# EAGLE board SGP40 Breakout-Panel (EAGLE 9.6.2), part 1 of 3
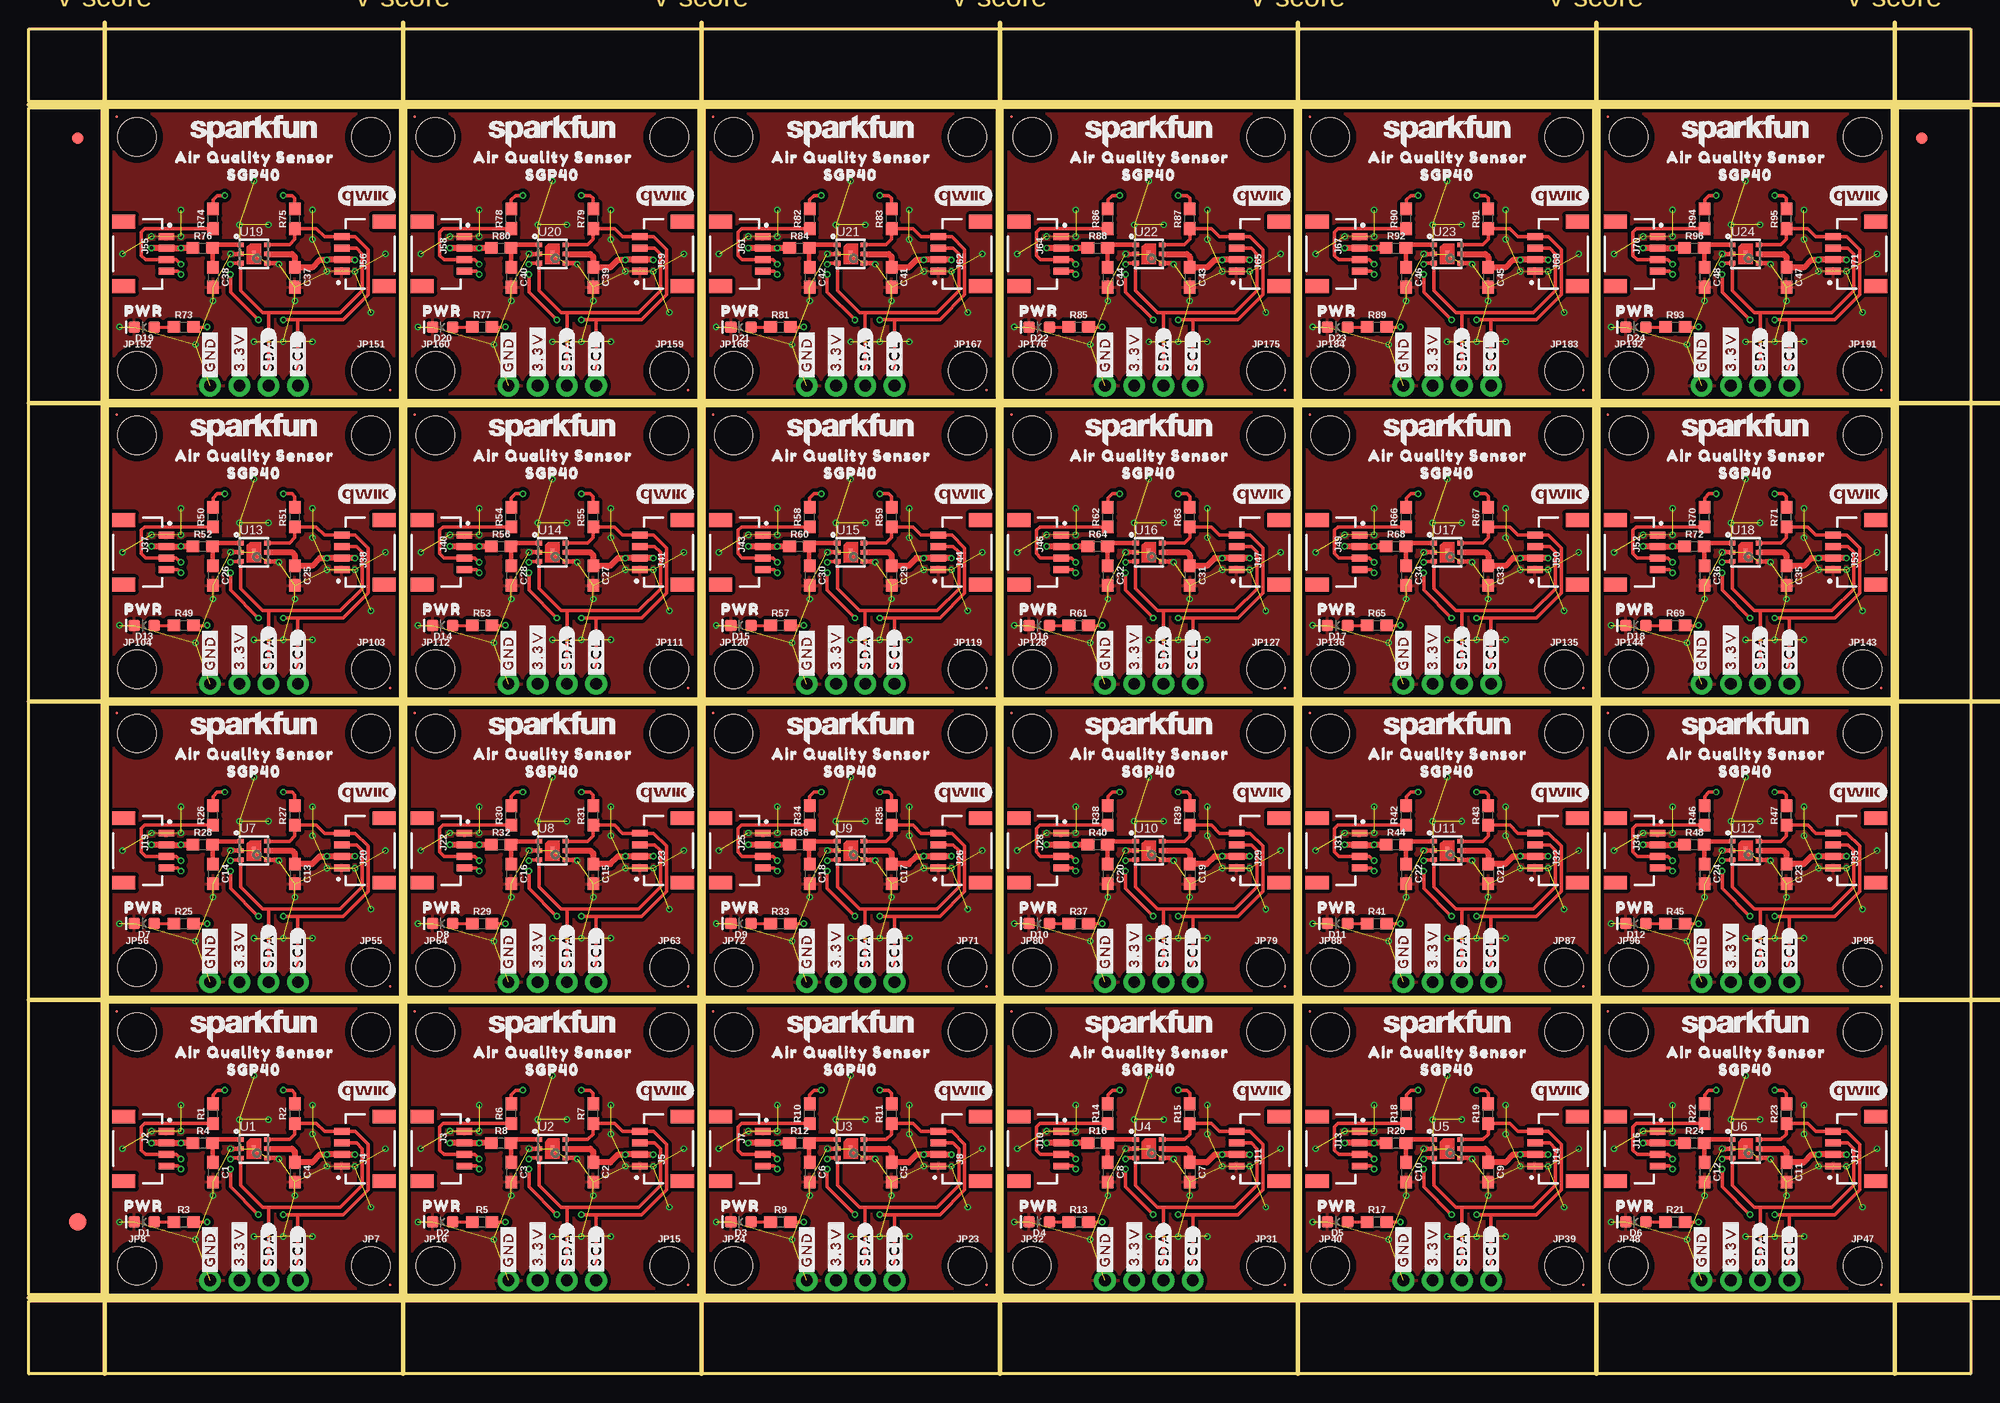
[diagram p0: board, top side]
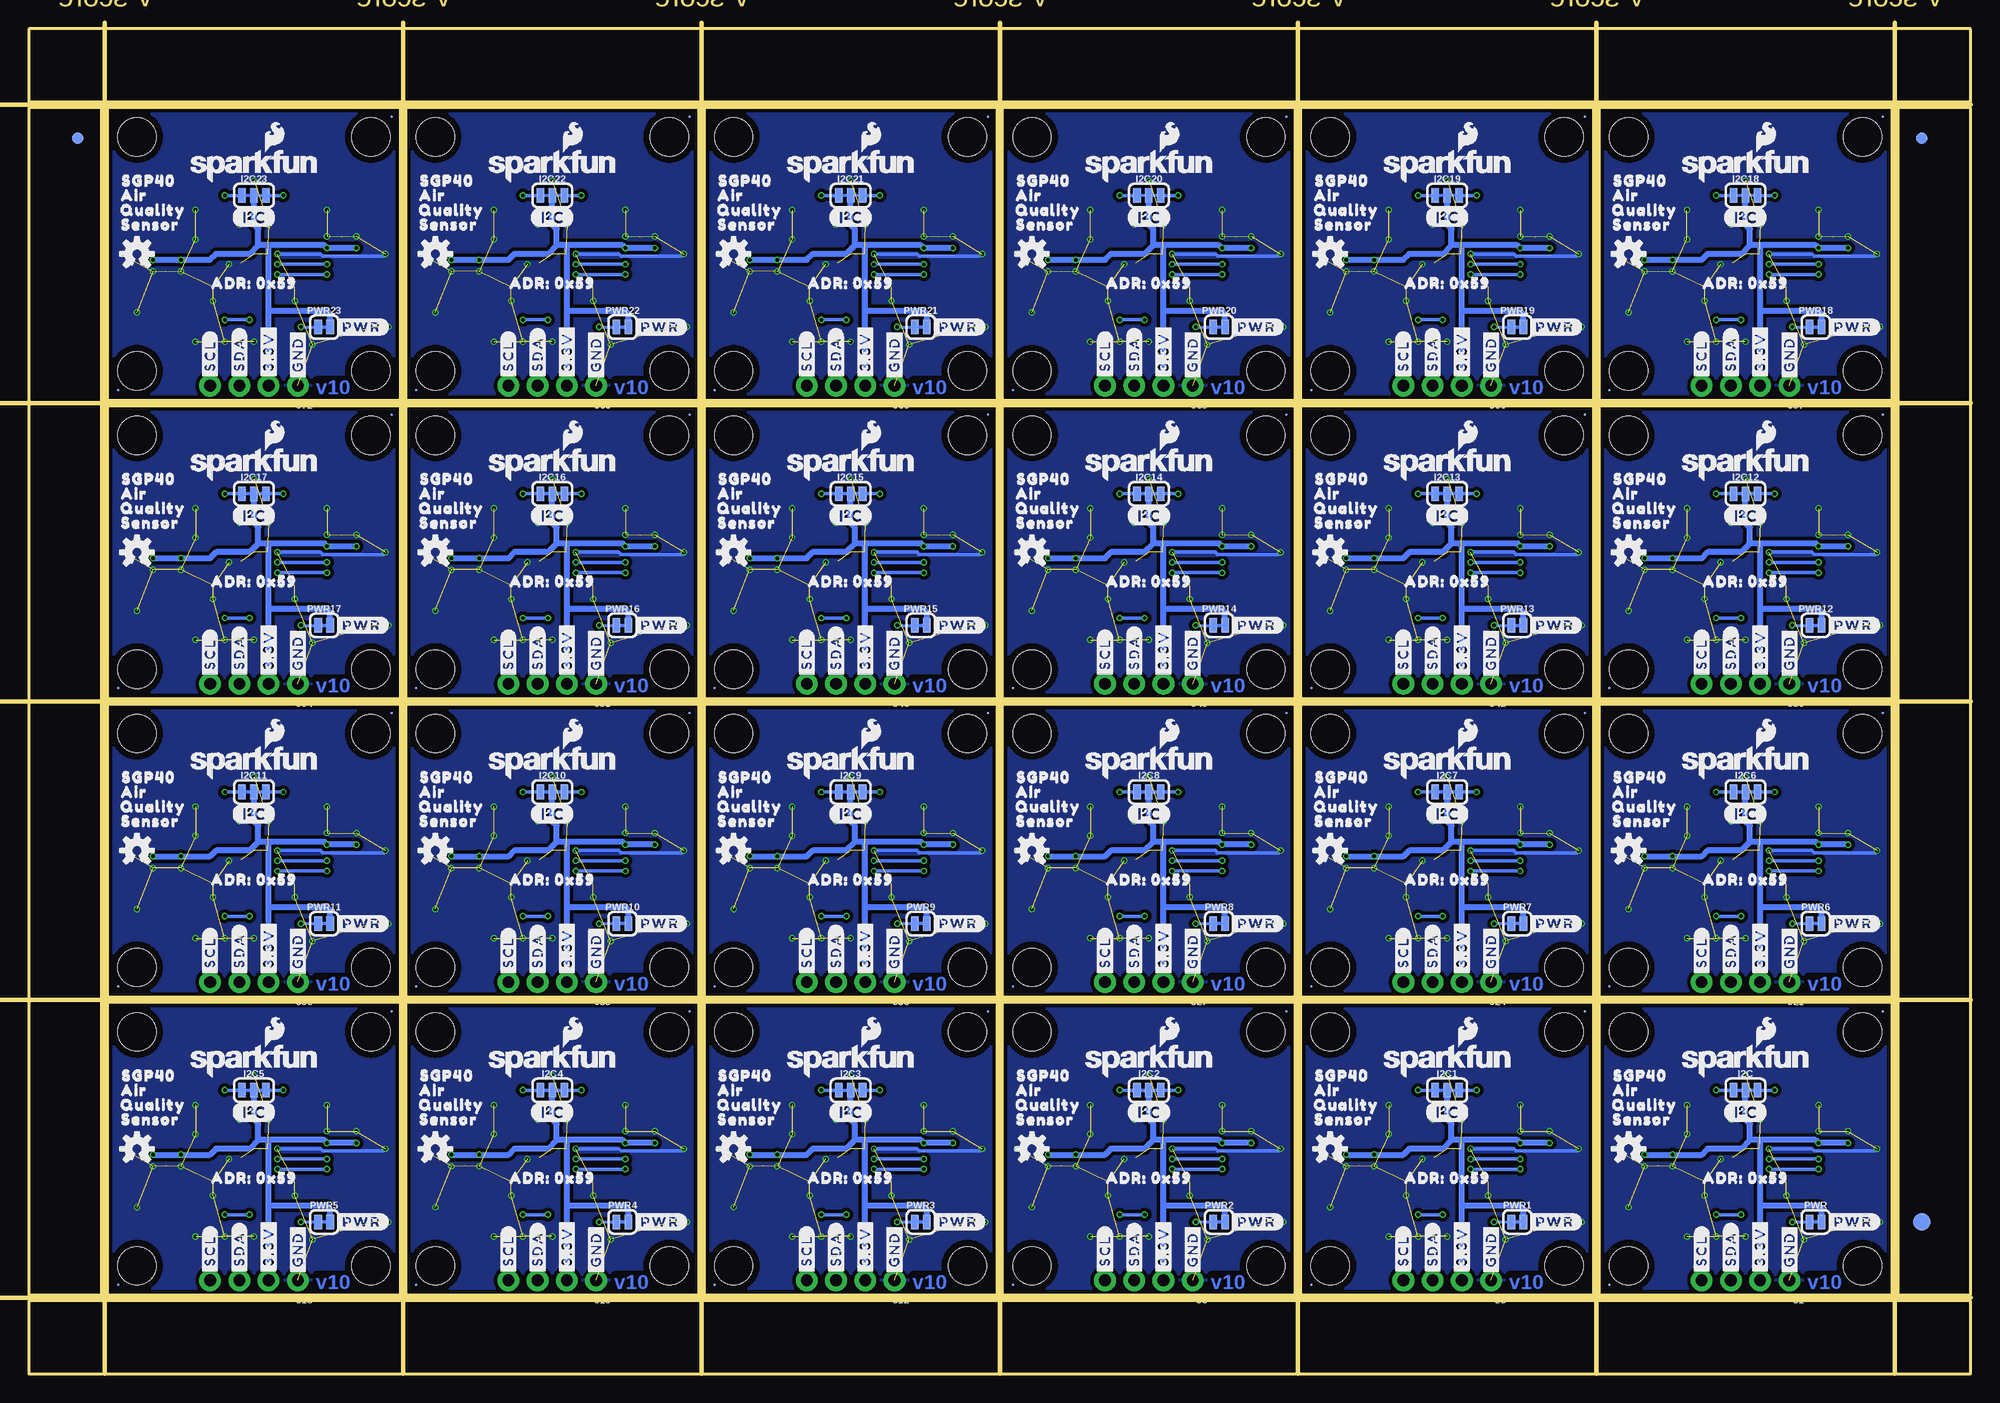
[diagram p1: board, bottom side, seen from below]

Size 168.66 x 116.84 mm. Coordinates in mm from the lower left corner, seen from the top.
Outline: 6.86,6.86 6.86,32.26 32.26,32.26 32.26,6.86 6.86,6.86
Outline: 32.77,6.86 32.77,32.26 58.17,32.26 58.17,6.86 32.77,6.86
Outline: 58.67,6.86 58.67,32.26 84.07,32.26 84.07,6.86 58.67,6.86
Outline: 84.58,6.86 84.58,32.26 109.98,32.26 109.98,6.86 84.58,6.86
Outline: 110.49,6.86 110.49,32.26 135.89,32.26 135.89,6.86 110.49,6.86
Outline: 136.4,6.86 136.4,32.26 161.8,32.26 161.8,6.86 136.4,6.86
Outline: 6.86,32.77 6.86,58.17 32.26,58.17 32.26,32.77 6.86,32.77
Outline: 32.77,32.77 32.77,58.17 58.17,58.17 58.17,32.77 32.77,32.77
Outline: 58.67,32.77 58.67,58.17 84.07,58.17 84.07,32.77 58.67,32.77
Outline: 84.58,32.77 84.58,58.17 109.98,58.17 109.98,32.77 84.58,32.77
Outline: 110.49,32.77 110.49,58.17 135.89,58.17 135.89,32.77 110.49,32.77
Outline: 136.4,32.77 136.4,58.17 161.8,58.17 161.8,32.77 136.4,32.77
Outline: 6.86,58.67 6.86,84.07 32.26,84.07 32.26,58.67 6.86,58.67
Outline: 32.77,58.67 32.77,84.07 58.17,84.07 58.17,58.67 32.77,58.67
Outline: 58.67,58.67 58.67,84.07 84.07,84.07 84.07,58.67 58.67,58.67
Outline: 84.58,58.67 84.58,84.07 109.98,84.07 109.98,58.67 84.58,58.67
Outline: 110.49,58.67 110.49,84.07 135.89,84.07 135.89,58.67 110.49,58.67
Outline: 136.4,58.67 136.4,84.07 161.8,84.07 161.8,58.67 136.4,58.67
Outline: 6.86,84.58 6.86,109.98 32.26,109.98 32.26,84.58 6.86,84.58
Outline: 32.77,84.58 32.77,109.98 58.17,109.98 58.17,84.58 32.77,84.58
Outline: 58.67,84.58 58.67,109.98 84.07,109.98 84.07,84.58 58.67,84.58
Outline: 84.58,84.58 84.58,109.98 109.98,109.98 109.98,84.58 84.58,84.58
Outline: 110.49,84.58 110.49,109.98 135.89,109.98 135.89,84.58 110.49,84.58
Outline: 136.4,84.58 136.4,109.98 161.8,109.98 161.8,84.58 136.4,84.58
Outline: 0,6.35 168.66,6.35 168.66,0 0,0 0,6.35
Outline: 162.31,109.98 168.66,109.98 168.66,6.86 162.31,6.86 162.31,109.98
Outline: 0,116.84 168.66,116.84 168.66,110.49 0,110.49 0,116.84
Outline: 0,109.98 6.35,109.98 6.35,6.86 0,6.86 0,109.98
Copper layers (1*16): Top 0.035mm / dielectric 1.5mm / Bottom 0.035mm
Design rules "SGP40 Breakout": minimum track width 5mil, minimum drill 0.3mm, track to track 5mil, track to pad 5mil, pad to pad 5mil, via to via 5mil, smd to smd 5mil, copper to edge 7mil, drill to drill 7mil, minimum pad ring 5mil, minimum via ring 5mil, stop-mask expansion 2.5mil, vias tented up to drill 25mil, thermal gap 10mil
Milling: 12 lines

## Footprints (pad centres in the part's own frame; a part is rotated, then mirrored left to right if it is on the bottom)
0603 = smd 1.1 x 1: 1 -0.85,0; 2 0.85,0
LED-0603 = smd 1 x 1: A -0.877,0; C 0.877,0
FIDUCIAL-1X2 = smd 1 x 1: 1 0,0
FIDUCIAL-1.5X3 = smd 1.5 x 1.5: 1 0,0
SMT-JUMPER_3_2-NC_TRACE_SILK = smd 0.66 x 1.27: 1 -1.041,0; 2 0,0; 3 1.041,0
1X04_NO_SILK = drill 1.016 pad 1.88: 1 0,0; 2 2.54,0; 3 5.08,0; 4 7.62,0
JST04_1MM_RA = smd 0.6 x 1.35: 1 -1.5,0; 2 -0.5,0; 3 0.5,0; 4 1.5,0 | smd 1.2 x 2: NC1 2.8,-3.675; NC2 -2.8,-3.675
FIDUCIAL-0.2MM = smd 0.2 x 0.2: 1 0,0
STAND-OFF = hole 3.302: 0,0
SMT-JUMPER_2_NC_TRACE_SILK = smd 0.66 x 1.27: 1 -0.521,0; 2 0.521,0
SGP40 = smd 0.55 x 0.4: 1 -1.15,0.8; 2 -1.15,0; 3 -1.15,-0.8; 4 1.15,-0.8; 5 1.15,0; 6 1.15,0.8 | smd 0.305 x 0.61: DIEPAD 0,0

## Placement (x,y rotation side)
C1  1.0uF  [0603]  16,17.53 270 top
C2  1.0uF  [0603]  49.02,17.53 270 top
C3  1.0uF  [0603]  41.91,17.53 270 top
C4  1.0uF  [0603]  23.11,17.53 270 top
C5  1.0uF  [0603]  74.93,17.53 270 top
C6  1.0uF  [0603]  67.82,17.53 270 top
C7  1.0uF  [0603]  100.84,17.53 270 top
C8  1.0uF  [0603]  93.73,17.53 270 top
C9  1.0uF  [0603]  126.75,17.53 270 top
C10  1.0uF  [0603]  119.63,17.53 270 top
C11  1.0uF  [0603]  152.65,17.53 270 top
C12  1.0uF  [0603]  145.54,17.53 270 top
C13  1.0uF  [0603]  23.11,43.43 270 top
C14  1.0uF  [0603]  16,43.43 270 top
C15  1.0uF  [0603]  49.02,43.43 270 top
C16  1.0uF  [0603]  41.91,43.43 270 top
C17  1.0uF  [0603]  74.93,43.43 270 top
C18  1.0uF  [0603]  67.82,43.43 270 top
C19  1.0uF  [0603]  100.84,43.43 270 top
C20  1.0uF  [0603]  93.73,43.43 270 top
C21  1.0uF  [0603]  126.75,43.43 270 top
C22  1.0uF  [0603]  119.63,43.43 270 top
C23  1.0uF  [0603]  152.65,43.43 270 top
C24  1.0uF  [0603]  145.54,43.43 270 top
C25  1.0uF  [0603]  23.11,69.34 270 top
C26  1.0uF  [0603]  16,69.34 270 top
C27  1.0uF  [0603]  49.02,69.34 270 top
C28  1.0uF  [0603]  41.91,69.34 270 top
C29  1.0uF  [0603]  74.93,69.34 270 top
C30  1.0uF  [0603]  67.82,69.34 270 top
C31  1.0uF  [0603]  100.84,69.34 270 top
C32  1.0uF  [0603]  93.73,69.34 270 top
C33  1.0uF  [0603]  126.75,69.34 270 top
C34  1.0uF  [0603]  119.63,69.34 270 top
C35  1.0uF  [0603]  152.65,69.34 270 top
C36  1.0uF  [0603]  145.54,69.34 270 top
C37  1.0uF  [0603]  23.11,95.25 270 top
C38  1.0uF  [0603]  16,95.25 270 top
C39  1.0uF  [0603]  49.02,95.25 270 top
C40  1.0uF  [0603]  41.91,95.25 270 top
C41  1.0uF  [0603]  74.93,95.25 270 top
C42  1.0uF  [0603]  67.82,95.25 270 top
C43  1.0uF  [0603]  100.84,95.25 270 top
C44  1.0uF  [0603]  93.73,95.25 270 top
C45  1.0uF  [0603]  126.75,95.25 270 top
C46  1.0uF  [0603]  119.63,95.25 270 top
C47  1.0uF  [0603]  152.65,95.25 270 top
C48  1.0uF  [0603]  145.54,95.25 270 top
D1  RED  [LED-0603]  10.03,13.21 180 top
D2  RED  [LED-0603]  35.94,13.21 180 top
D3  RED  [LED-0603]  61.85,13.21 180 top
D4  RED  [LED-0603]  87.76,13.21 180 top
D5  RED  [LED-0603]  113.67,13.21 180 top
D6  RED  [LED-0603]  139.57,13.21 180 top
D7  RED  [LED-0603]  10.03,39.12 180 top
D8  RED  [LED-0603]  35.94,39.12 180 top
D9  RED  [LED-0603]  61.85,39.12 180 top
D10  RED  [LED-0603]  87.76,39.12 180 top
D11  RED  [LED-0603]  113.67,39.12 180 top
D12  RED  [LED-0603]  139.57,39.12 180 top
D13  RED  [LED-0603]  10.03,65.02 180 top
D14  RED  [LED-0603]  35.94,65.02 180 top
D15  RED  [LED-0603]  61.85,65.02 180 top
D16  RED  [LED-0603]  87.76,65.02 180 top
D17  RED  [LED-0603]  113.67,65.02 180 top
D18  RED  [LED-0603]  139.57,65.02 180 top
D19  RED  [LED-0603]  10.03,90.93 180 top
D20  RED  [LED-0603]  35.94,90.93 180 top
D21  RED  [LED-0603]  61.85,90.93 180 top
D22  RED  [LED-0603]  87.76,90.93 180 top
D23  RED  [LED-0603]  113.67,90.93 180 top
D24  RED  [LED-0603]  139.57,90.93 180 top
E$1  [FIDUCIAL-1X2]  4.23,107.31 0 top
E$2  [FIDUCIAL-1X2]  4.23,107.31 0 bottom
E$3  [FIDUCIAL-1X2]  164.42,107.31 0 top
E$4  [FIDUCIAL-1X2]  164.42,107.31 0 bottom
E$5  [FIDUCIAL-1.5X3]  4.23,13.21 0 top
E$6  [FIDUCIAL-1.5X3]  4.23,13.21 0 bottom
I2C  JUMPER-SMT_3_2-NC_TRACE_SILK  [SMT-JUMPER_3_2-NC_TRACE_SILK]  19.56,24.64 0 bottom
I2C1  JUMPER-SMT_3_2-NC_TRACE_SILK  [SMT-JUMPER_3_2-NC_TRACE_SILK]  45.47,24.64 0 bottom
I2C2  JUMPER-SMT_3_2-NC_TRACE_SILK  [SMT-JUMPER_3_2-NC_TRACE_SILK]  71.37,24.64 0 bottom
I2C3  JUMPER-SMT_3_2-NC_TRACE_SILK  [SMT-JUMPER_3_2-NC_TRACE_SILK]  97.28,24.64 0 bottom
I2C4  JUMPER-SMT_3_2-NC_TRACE_SILK  [SMT-JUMPER_3_2-NC_TRACE_SILK]  123.19,24.64 0 bottom
I2C5  JUMPER-SMT_3_2-NC_TRACE_SILK  [SMT-JUMPER_3_2-NC_TRACE_SILK]  149.1,24.64 0 bottom
I2C6  JUMPER-SMT_3_2-NC_TRACE_SILK  [SMT-JUMPER_3_2-NC_TRACE_SILK]  19.56,50.55 0 bottom
I2C7  JUMPER-SMT_3_2-NC_TRACE_SILK  [SMT-JUMPER_3_2-NC_TRACE_SILK]  45.47,50.55 0 bottom
I2C8  JUMPER-SMT_3_2-NC_TRACE_SILK  [SMT-JUMPER_3_2-NC_TRACE_SILK]  71.37,50.55 0 bottom
I2C9  JUMPER-SMT_3_2-NC_TRACE_SILK  [SMT-JUMPER_3_2-NC_TRACE_SILK]  97.28,50.55 0 bottom
I2C10  JUMPER-SMT_3_2-NC_TRACE_SILK  [SMT-JUMPER_3_2-NC_TRACE_SILK]  123.19,50.55 0 bottom
I2C11  JUMPER-SMT_3_2-NC_TRACE_SILK  [SMT-JUMPER_3_2-NC_TRACE_SILK]  149.1,50.55 0 bottom
I2C12  JUMPER-SMT_3_2-NC_TRACE_SILK  [SMT-JUMPER_3_2-NC_TRACE_SILK]  19.56,76.45 0 bottom
I2C13  JUMPER-SMT_3_2-NC_TRACE_SILK  [SMT-JUMPER_3_2-NC_TRACE_SILK]  45.47,76.45 0 bottom
I2C14  JUMPER-SMT_3_2-NC_TRACE_SILK  [SMT-JUMPER_3_2-NC_TRACE_SILK]  71.37,76.45 0 bottom
I2C15  JUMPER-SMT_3_2-NC_TRACE_SILK  [SMT-JUMPER_3_2-NC_TRACE_SILK]  97.28,76.45 0 bottom
I2C16  JUMPER-SMT_3_2-NC_TRACE_SILK  [SMT-JUMPER_3_2-NC_TRACE_SILK]  123.19,76.45 0 bottom
I2C17  JUMPER-SMT_3_2-NC_TRACE_SILK  [SMT-JUMPER_3_2-NC_TRACE_SILK]  149.1,76.45 0 bottom
I2C18  JUMPER-SMT_3_2-NC_TRACE_SILK  [SMT-JUMPER_3_2-NC_TRACE_SILK]  19.56,102.36 0 bottom
I2C19  JUMPER-SMT_3_2-NC_TRACE_SILK  [SMT-JUMPER_3_2-NC_TRACE_SILK]  45.47,102.36 0 bottom
I2C20  JUMPER-SMT_3_2-NC_TRACE_SILK  [SMT-JUMPER_3_2-NC_TRACE_SILK]  71.37,102.36 0 bottom
I2C21  JUMPER-SMT_3_2-NC_TRACE_SILK  [SMT-JUMPER_3_2-NC_TRACE_SILK]  97.28,102.36 0 bottom
I2C22  JUMPER-SMT_3_2-NC_TRACE_SILK  [SMT-JUMPER_3_2-NC_TRACE_SILK]  123.19,102.36 0 bottom
I2C23  JUMPER-SMT_3_2-NC_TRACE_SILK  [SMT-JUMPER_3_2-NC_TRACE_SILK]  149.1,102.36 0 bottom
J1  DNP  [1X04_NO_SILK]  15.75,8.13 180 bottom
J2  QWIIC_RA  [JST04_1MM_RA]  11.94,19.56 270 top
J3  QWIIC_RA  [JST04_1MM_RA]  37.85,19.56 270 top
J4  QWIIC_RA  [JST04_1MM_RA]  27.18,19.56 90 top
J5  QWIIC_RA  [JST04_1MM_RA]  53.09,19.56 90 top
J6  DNP  [1X04_NO_SILK]  41.66,8.13 180 bottom
J7  QWIIC_RA  [JST04_1MM_RA]  63.75,19.56 270 top
J8  QWIIC_RA  [JST04_1MM_RA]  78.99,19.56 90 top
J9  DNP  [1X04_NO_SILK]  67.56,8.13 180 bottom
J10  QWIIC_RA  [JST04_1MM_RA]  89.66,19.56 270 top
J11  QWIIC_RA  [JST04_1MM_RA]  104.9,19.56 90 top
J12  DNP  [1X04_NO_SILK]  93.47,8.13 180 bottom
J13  QWIIC_RA  [JST04_1MM_RA]  115.57,19.56 270 top
J14  QWIIC_RA  [JST04_1MM_RA]  130.81,19.56 90 top
J15  DNP  [1X04_NO_SILK]  119.38,8.13 180 bottom
J16  QWIIC_RA  [JST04_1MM_RA]  141.48,19.56 270 top
J17  QWIIC_RA  [JST04_1MM_RA]  156.72,19.56 90 top
J18  DNP  [1X04_NO_SILK]  145.29,8.13 180 bottom
J19  QWIIC_RA  [JST04_1MM_RA]  11.94,45.47 270 top
J20  QWIIC_RA  [JST04_1MM_RA]  27.18,45.47 90 top
J21  DNP  [1X04_NO_SILK]  15.75,34.04 180 bottom
J22  QWIIC_RA  [JST04_1MM_RA]  37.85,45.47 270 top
J23  QWIIC_RA  [JST04_1MM_RA]  53.09,45.47 90 top
J24  DNP  [1X04_NO_SILK]  41.66,34.04 180 bottom
J25  QWIIC_RA  [JST04_1MM_RA]  63.75,45.47 270 top
J26  QWIIC_RA  [JST04_1MM_RA]  78.99,45.47 90 top
J27  DNP  [1X04_NO_SILK]  67.56,34.04 180 bottom
J28  QWIIC_RA  [JST04_1MM_RA]  89.66,45.47 270 top
J29  QWIIC_RA  [JST04_1MM_RA]  104.9,45.47 90 top
J30  DNP  [1X04_NO_SILK]  93.47,34.04 180 bottom
J31  QWIIC_RA  [JST04_1MM_RA]  115.57,45.47 270 top
J32  QWIIC_RA  [JST04_1MM_RA]  130.81,45.47 90 top
J33  DNP  [1X04_NO_SILK]  119.38,34.04 180 bottom
J34  QWIIC_RA  [JST04_1MM_RA]  141.48,45.47 270 top
J35  QWIIC_RA  [JST04_1MM_RA]  156.72,45.47 90 top
J36  DNP  [1X04_NO_SILK]  145.29,34.04 180 bottom
J37  QWIIC_RA  [JST04_1MM_RA]  11.94,71.37 270 top
J38  QWIIC_RA  [JST04_1MM_RA]  27.18,71.37 90 top
J39  DNP  [1X04_NO_SILK]  15.75,59.94 180 bottom
J40  QWIIC_RA  [JST04_1MM_RA]  37.85,71.37 270 top
J41  QWIIC_RA  [JST04_1MM_RA]  53.09,71.37 90 top
J42  DNP  [1X04_NO_SILK]  41.66,59.94 180 bottom
J43  QWIIC_RA  [JST04_1MM_RA]  63.75,71.37 270 top
J44  QWIIC_RA  [JST04_1MM_RA]  78.99,71.37 90 top
J45  DNP  [1X04_NO_SILK]  67.56,59.94 180 bottom
J46  QWIIC_RA  [JST04_1MM_RA]  89.66,71.37 270 top
J47  QWIIC_RA  [JST04_1MM_RA]  104.9,71.37 90 top
J48  DNP  [1X04_NO_SILK]  93.47,59.94 180 bottom
J49  QWIIC_RA  [JST04_1MM_RA]  115.57,71.37 270 top
J50  QWIIC_RA  [JST04_1MM_RA]  130.81,71.37 90 top
J51  DNP  [1X04_NO_SILK]  119.38,59.94 180 bottom
J52  QWIIC_RA  [JST04_1MM_RA]  141.48,71.37 270 top
J53  QWIIC_RA  [JST04_1MM_RA]  156.72,71.37 90 top
J54  DNP  [1X04_NO_SILK]  145.29,59.94 180 bottom
J55  QWIIC_RA  [JST04_1MM_RA]  11.94,97.28 270 top
J56  QWIIC_RA  [JST04_1MM_RA]  27.18,97.28 90 top
J57  DNP  [1X04_NO_SILK]  15.75,85.85 180 bottom
J58  QWIIC_RA  [JST04_1MM_RA]  37.85,97.28 270 top
J59  QWIIC_RA  [JST04_1MM_RA]  53.09,97.28 90 top
J60  DNP  [1X04_NO_SILK]  41.66,85.85 180 bottom
J61  QWIIC_RA  [JST04_1MM_RA]  63.75,97.28 270 top
J62  QWIIC_RA  [JST04_1MM_RA]  78.99,97.28 90 top
J63  DNP  [1X04_NO_SILK]  67.56,85.85 180 bottom
J64  QWIIC_RA  [JST04_1MM_RA]  89.66,97.28 270 top
J65  QWIIC_RA  [JST04_1MM_RA]  104.9,97.28 90 top
J66  DNP  [1X04_NO_SILK]  93.47,85.85 180 bottom
J67  QWIIC_RA  [JST04_1MM_RA]  115.57,97.28 270 top
J68  QWIIC_RA  [JST04_1MM_RA]  130.81,97.28 90 top
J69  DNP  [1X04_NO_SILK]  119.38,85.85 180 bottom
J70  QWIIC_RA  [JST04_1MM_RA]  141.48,97.28 270 top
J71  QWIIC_RA  [JST04_1MM_RA]  156.72,97.28 90 top
J72  DNP  [1X04_NO_SILK]  145.29,85.85 180 bottom
JP1  FIDUCIAL0.2MM  [FIDUCIAL-0.2MM]  7.62,31.5 0 bottom
JP2  FIDUCIAL0.2MM  [FIDUCIAL-0.2MM]  31.37,7.75 0 top
JP3  STAND-OFF  [STAND-OFF]  9.4,29.72 0 top
JP4  STAND-OFF  [STAND-OFF]  29.72,29.72 0 top
JP5  FIDUCIAL0.2MM  [FIDUCIAL-0.2MM]  31.37,7.75 0 bottom
JP6  FIDUCIAL0.2MM  [FIDUCIAL-0.2MM]  7.62,31.5 0 top
JP7  STAND-OFF  [STAND-OFF]  29.72,9.4 0 top
JP8  STAND-OFF  [STAND-OFF]  9.4,9.4 0 top
JP9  STAND-OFF  [STAND-OFF]  35.31,29.72 0 top
JP10  STAND-OFF  [STAND-OFF]  55.63,29.72 0 top
JP11  FIDUCIAL0.2MM  [FIDUCIAL-0.2MM]  57.28,7.75 0 top
JP12  FIDUCIAL0.2MM  [FIDUCIAL-0.2MM]  33.53,31.5 0 top
JP13  FIDUCIAL0.2MM  [FIDUCIAL-0.2MM]  33.53,31.5 0 bottom
JP14  FIDUCIAL0.2MM  [FIDUCIAL-0.2MM]  57.28,7.75 0 bottom
JP15  STAND-OFF  [STAND-OFF]  55.63,9.4 0 top
JP16  STAND-OFF  [STAND-OFF]  35.31,9.4 0 top
JP17  STAND-OFF  [STAND-OFF]  61.21,29.72 0 top
JP18  STAND-OFF  [STAND-OFF]  81.53,29.72 0 top
JP19  FIDUCIAL0.2MM  [FIDUCIAL-0.2MM]  83.19,7.75 0 top
JP20  FIDUCIAL0.2MM  [FIDUCIAL-0.2MM]  59.44,31.5 0 top
JP21  FIDUCIAL0.2MM  [FIDUCIAL-0.2MM]  59.44,31.5 0 bottom
JP22  FIDUCIAL0.2MM  [FIDUCIAL-0.2MM]  83.19,7.75 0 bottom
JP23  STAND-OFF  [STAND-OFF]  81.53,9.4 0 top
JP24  STAND-OFF  [STAND-OFF]  61.21,9.4 0 top
JP25  STAND-OFF  [STAND-OFF]  87.12,29.72 0 top
JP26  STAND-OFF  [STAND-OFF]  107.44,29.72 0 top
JP27  FIDUCIAL0.2MM  [FIDUCIAL-0.2MM]  109.09,7.75 0 top
JP28  FIDUCIAL0.2MM  [FIDUCIAL-0.2MM]  85.34,31.5 0 top
JP29  FIDUCIAL0.2MM  [FIDUCIAL-0.2MM]  85.34,31.5 0 bottom
JP30  FIDUCIAL0.2MM  [FIDUCIAL-0.2MM]  109.09,7.75 0 bottom
JP31  STAND-OFF  [STAND-OFF]  107.44,9.4 0 top
JP32  STAND-OFF  [STAND-OFF]  87.12,9.4 0 top
JP33  STAND-OFF  [STAND-OFF]  113.03,29.72 0 top
JP34  STAND-OFF  [STAND-OFF]  133.35,29.72 0 top
JP35  FIDUCIAL0.2MM  [FIDUCIAL-0.2MM]  135,7.75 0 top
JP36  FIDUCIAL0.2MM  [FIDUCIAL-0.2MM]  111.25,31.5 0 top
JP37  FIDUCIAL0.2MM  [FIDUCIAL-0.2MM]  111.25,31.5 0 bottom
JP38  FIDUCIAL0.2MM  [FIDUCIAL-0.2MM]  135,7.75 0 bottom
JP39  STAND-OFF  [STAND-OFF]  133.35,9.4 0 top
JP40  STAND-OFF  [STAND-OFF]  113.03,9.4 0 top
JP41  STAND-OFF  [STAND-OFF]  138.94,29.72 0 top
JP42  STAND-OFF  [STAND-OFF]  159.26,29.72 0 top
JP43  FIDUCIAL0.2MM  [FIDUCIAL-0.2MM]  160.91,7.75 0 top
JP44  FIDUCIAL0.2MM  [FIDUCIAL-0.2MM]  137.16,31.5 0 top
JP45  FIDUCIAL0.2MM  [FIDUCIAL-0.2MM]  137.16,31.5 0 bottom
JP46  FIDUCIAL0.2MM  [FIDUCIAL-0.2MM]  160.91,7.75 0 bottom
JP47  STAND-OFF  [STAND-OFF]  159.26,9.4 0 top
JP48  STAND-OFF  [STAND-OFF]  138.94,9.4 0 top
JP49  STAND-OFF  [STAND-OFF]  9.4,55.63 0 top
JP50  STAND-OFF  [STAND-OFF]  29.72,55.63 0 top
JP51  FIDUCIAL0.2MM  [FIDUCIAL-0.2MM]  31.37,33.66 0 top
JP52  FIDUCIAL0.2MM  [FIDUCIAL-0.2MM]  7.62,57.4 0 top
JP53  FIDUCIAL0.2MM  [FIDUCIAL-0.2MM]  7.62,57.4 0 bottom
JP54  FIDUCIAL0.2MM  [FIDUCIAL-0.2MM]  31.37,33.66 0 bottom
JP55  STAND-OFF  [STAND-OFF]  29.72,35.31 0 top
JP56  STAND-OFF  [STAND-OFF]  9.4,35.31 0 top
JP57  STAND-OFF  [STAND-OFF]  35.31,55.63 0 top
JP58  STAND-OFF  [STAND-OFF]  55.63,55.63 0 top
JP59  FIDUCIAL0.2MM  [FIDUCIAL-0.2MM]  57.28,33.66 0 top
JP60  FIDUCIAL0.2MM  [FIDUCIAL-0.2MM]  33.53,57.4 0 top
JP61  FIDUCIAL0.2MM  [FIDUCIAL-0.2MM]  33.53,57.4 0 bottom
JP62  FIDUCIAL0.2MM  [FIDUCIAL-0.2MM]  57.28,33.66 0 bottom
JP63  STAND-OFF  [STAND-OFF]  55.63,35.31 0 top
JP64  STAND-OFF  [STAND-OFF]  35.31,35.31 0 top
JP65  STAND-OFF  [STAND-OFF]  61.21,55.63 0 top
JP66  STAND-OFF  [STAND-OFF]  81.53,55.63 0 top
JP67  FIDUCIAL0.2MM  [FIDUCIAL-0.2MM]  83.19,33.66 0 top
JP68  FIDUCIAL0.2MM  [FIDUCIAL-0.2MM]  59.44,57.4 0 top
JP69  FIDUCIAL0.2MM  [FIDUCIAL-0.2MM]  59.44,57.4 0 bottom
JP70  FIDUCIAL0.2MM  [FIDUCIAL-0.2MM]  83.19,33.66 0 bottom
JP71  STAND-OFF  [STAND-OFF]  81.53,35.31 0 top
JP72  STAND-OFF  [STAND-OFF]  61.21,35.31 0 top
JP73  STAND-OFF  [STAND-OFF]  87.12,55.63 0 top
JP74  STAND-OFF  [STAND-OFF]  107.44,55.63 0 top
JP75  FIDUCIAL0.2MM  [FIDUCIAL-0.2MM]  109.09,33.66 0 top
JP76  FIDUCIAL0.2MM  [FIDUCIAL-0.2MM]  85.34,57.4 0 top
JP77  FIDUCIAL0.2MM  [FIDUCIAL-0.2MM]  85.34,57.4 0 bottom
JP78  FIDUCIAL0.2MM  [FIDUCIAL-0.2MM]  109.09,33.66 0 bottom
JP79  STAND-OFF  [STAND-OFF]  107.44,35.31 0 top
JP80  STAND-OFF  [STAND-OFF]  87.12,35.31 0 top
JP81  STAND-OFF  [STAND-OFF]  113.03,55.63 0 top
JP82  STAND-OFF  [STAND-OFF]  133.35,55.63 0 top
JP83  FIDUCIAL0.2MM  [FIDUCIAL-0.2MM]  135,33.66 0 top
JP84  FIDUCIAL0.2MM  [FIDUCIAL-0.2MM]  111.25,57.4 0 top
JP85  FIDUCIAL0.2MM  [FIDUCIAL-0.2MM]  111.25,57.4 0 bottom
JP86  FIDUCIAL0.2MM  [FIDUCIAL-0.2MM]  135,33.66 0 bottom
JP87  STAND-OFF  [STAND-OFF]  133.35,35.31 0 top
JP88  STAND-OFF  [STAND-OFF]  113.03,35.31 0 top
JP89  STAND-OFF  [STAND-OFF]  138.94,55.63 0 top
JP90  STAND-OFF  [STAND-OFF]  159.26,55.63 0 top
JP91  FIDUCIAL0.2MM  [FIDUCIAL-0.2MM]  160.91,33.66 0 top
JP92  FIDUCIAL0.2MM  [FIDUCIAL-0.2MM]  137.16,57.4 0 top
JP93  FIDUCIAL0.2MM  [FIDUCIAL-0.2MM]  137.16,57.4 0 bottom
JP94  FIDUCIAL0.2MM  [FIDUCIAL-0.2MM]  160.91,33.66 0 bottom
JP95  STAND-OFF  [STAND-OFF]  159.26,35.31 0 top
JP96  STAND-OFF  [STAND-OFF]  138.94,35.31 0 top
JP97  STAND-OFF  [STAND-OFF]  9.4,81.53 0 top
JP98  STAND-OFF  [STAND-OFF]  29.72,81.53 0 top
JP99  FIDUCIAL0.2MM  [FIDUCIAL-0.2MM]  31.37,59.56 0 top
JP100  FIDUCIAL0.2MM  [FIDUCIAL-0.2MM]  7.62,83.31 0 top
JP101  FIDUCIAL0.2MM  [FIDUCIAL-0.2MM]  7.62,83.31 0 bottom
JP102  FIDUCIAL0.2MM  [FIDUCIAL-0.2MM]  31.37,59.56 0 bottom
JP103  STAND-OFF  [STAND-OFF]  29.72,61.21 0 top
JP104  STAND-OFF  [STAND-OFF]  9.4,61.21 0 top
JP105  STAND-OFF  [STAND-OFF]  35.31,81.53 0 top
JP106  STAND-OFF  [STAND-OFF]  55.63,81.53 0 top
JP107  FIDUCIAL0.2MM  [FIDUCIAL-0.2MM]  57.28,59.56 0 top
JP108  FIDUCIAL0.2MM  [FIDUCIAL-0.2MM]  33.53,83.31 0 top
JP109  FIDUCIAL0.2MM  [FIDUCIAL-0.2MM]  33.53,83.31 0 bottom
JP110  FIDUCIAL0.2MM  [FIDUCIAL-0.2MM]  57.28,59.56 0 bottom
JP111  STAND-OFF  [STAND-OFF]  55.63,61.21 0 top
JP112  STAND-OFF  [STAND-OFF]  35.31,61.21 0 top
JP113  STAND-OFF  [STAND-OFF]  61.21,81.53 0 top
JP114  STAND-OFF  [STAND-OFF]  81.53,81.53 0 top
JP115  FIDUCIAL0.2MM  [FIDUCIAL-0.2MM]  83.19,59.56 0 top
JP116  FIDUCIAL0.2MM  [FIDUCIAL-0.2MM]  59.44,83.31 0 top
JP117  FIDUCIAL0.2MM  [FIDUCIAL-0.2MM]  59.44,83.31 0 bottom
JP118  FIDUCIAL0.2MM  [FIDUCIAL-0.2MM]  83.19,59.56 0 bottom
JP119  STAND-OFF  [STAND-OFF]  81.53,61.21 0 top
JP120  STAND-OFF  [STAND-OFF]  61.21,61.21 0 top
JP121  STAND-OFF  [STAND-OFF]  87.12,81.53 0 top
JP122  STAND-OFF  [STAND-OFF]  107.44,81.53 0 top
JP123  FIDUCIAL0.2MM  [FIDUCIAL-0.2MM]  109.09,59.56 0 top
JP124  FIDUCIAL0.2MM  [FIDUCIAL-0.2MM]  85.34,83.31 0 top
JP125  FIDUCIAL0.2MM  [FIDUCIAL-0.2MM]  85.34,83.31 0 bottom
JP126  FIDUCIAL0.2MM  [FIDUCIAL-0.2MM]  109.09,59.56 0 bottom
JP127  STAND-OFF  [STAND-OFF]  107.44,61.21 0 top
JP128  STAND-OFF  [STAND-OFF]  87.12,61.21 0 top
JP129  STAND-OFF  [STAND-OFF]  113.03,81.53 0 top
JP130  STAND-OFF  [STAND-OFF]  133.35,81.53 0 top
JP131  FIDUCIAL0.2MM  [FIDUCIAL-0.2MM]  135,59.56 0 top
JP132  FIDUCIAL0.2MM  [FIDUCIAL-0.2MM]  111.25,83.31 0 top
JP133  FIDUCIAL0.2MM  [FIDUCIAL-0.2MM]  111.25,83.31 0 bottom
JP134  FIDUCIAL0.2MM  [FIDUCIAL-0.2MM]  135,59.56 0 bottom
JP135  STAND-OFF  [STAND-OFF]  133.35,61.21 0 top
JP136  STAND-OFF  [STAND-OFF]  113.03,61.21 0 top
JP137  STAND-OFF  [STAND-OFF]  138.94,81.53 0 top
JP138  STAND-OFF  [STAND-OFF]  159.26,81.53 0 top
JP139  FIDUCIAL0.2MM  [FIDUCIAL-0.2MM]  160.91,59.56 0 top
JP140  FIDUCIAL0.2MM  [FIDUCIAL-0.2MM]  137.16,83.31 0 top
JP141  FIDUCIAL0.2MM  [FIDUCIAL-0.2MM]  137.16,83.31 0 bottom
JP142  FIDUCIAL0.2MM  [FIDUCIAL-0.2MM]  160.91,59.56 0 bottom
JP143  STAND-OFF  [STAND-OFF]  159.26,61.21 0 top
JP144  STAND-OFF  [STAND-OFF]  138.94,61.21 0 top
JP145  STAND-OFF  [STAND-OFF]  9.4,107.44 0 top
JP146  STAND-OFF  [STAND-OFF]  29.72,107.44 0 top
JP147  FIDUCIAL0.2MM  [FIDUCIAL-0.2MM]  31.37,85.47 0 top
JP148  FIDUCIAL0.2MM  [FIDUCIAL-0.2MM]  7.62,109.22 0 top
JP149  FIDUCIAL0.2MM  [FIDUCIAL-0.2MM]  7.62,109.22 0 bottom
JP150  FIDUCIAL0.2MM  [FIDUCIAL-0.2MM]  31.37,85.47 0 bottom
JP151  STAND-OFF  [STAND-OFF]  29.72,87.12 0 top
JP152  STAND-OFF  [STAND-OFF]  9.4,87.12 0 top
JP153  STAND-OFF  [STAND-OFF]  35.31,107.44 0 top
JP154  STAND-OFF  [STAND-OFF]  55.63,107.44 0 top
JP155  FIDUCIAL0.2MM  [FIDUCIAL-0.2MM]  57.28,85.47 0 top
JP156  FIDUCIAL0.2MM  [FIDUCIAL-0.2MM]  33.53,109.22 0 top
JP157  FIDUCIAL0.2MM  [FIDUCIAL-0.2MM]  33.53,109.22 0 bottom
JP158  FIDUCIAL0.2MM  [FIDUCIAL-0.2MM]  57.28,85.47 0 bottom
JP159  STAND-OFF  [STAND-OFF]  55.63,87.12 0 top
JP160  STAND-OFF  [STAND-OFF]  35.31,87.12 0 top
JP161  STAND-OFF  [STAND-OFF]  61.21,107.44 0 top
JP162  STAND-OFF  [STAND-OFF]  81.53,107.44 0 top
JP163  FIDUCIAL0.2MM  [FIDUCIAL-0.2MM]  83.19,85.47 0 top
JP164  FIDUCIAL0.2MM  [FIDUCIAL-0.2MM]  59.44,109.22 0 top
JP165  FIDUCIAL0.2MM  [FIDUCIAL-0.2MM]  59.44,109.22 0 bottom
JP166  FIDUCIAL0.2MM  [FIDUCIAL-0.2MM]  83.19,85.47 0 bottom
JP167  STAND-OFF  [STAND-OFF]  81.53,87.12 0 top
JP168  STAND-OFF  [STAND-OFF]  61.21,87.12 0 top
JP169  STAND-OFF  [STAND-OFF]  87.12,107.44 0 top
JP170  STAND-OFF  [STAND-OFF]  107.44,107.44 0 top
JP171  FIDUCIAL0.2MM  [FIDUCIAL-0.2MM]  109.09,85.47 0 top
JP172  FIDUCIAL0.2MM  [FIDUCIAL-0.2MM]  85.34,109.22 0 top
JP173  FIDUCIAL0.2MM  [FIDUCIAL-0.2MM]  85.34,109.22 0 bottom
JP174  FIDUCIAL0.2MM  [FIDUCIAL-0.2MM]  109.09,85.47 0 bottom
JP175  STAND-OFF  [STAND-OFF]  107.44,87.12 0 top
JP176  STAND-OFF  [STAND-OFF]  87.12,87.12 0 top
JP177  STAND-OFF  [STAND-OFF]  113.03,107.44 0 top
JP178  STAND-OFF  [STAND-OFF]  133.35,107.44 0 top
JP179  FIDUCIAL0.2MM  [FIDUCIAL-0.2MM]  135,85.47 0 top
JP180  FIDUCIAL0.2MM  [FIDUCIAL-0.2MM]  111.25,109.22 0 top
JP181  FIDUCIAL0.2MM  [FIDUCIAL-0.2MM]  111.25,109.22 0 bottom
JP182  FIDUCIAL0.2MM  [FIDUCIAL-0.2MM]  135,85.47 0 bottom
JP183  STAND-OFF  [STAND-OFF]  133.35,87.12 0 top
JP184  STAND-OFF  [STAND-OFF]  113.03,87.12 0 top
JP185  STAND-OFF  [STAND-OFF]  138.94,107.44 0 top
JP186  STAND-OFF  [STAND-OFF]  159.26,107.44 0 top
JP187  FIDUCIAL0.2MM  [FIDUCIAL-0.2MM]  160.91,85.47 0 top
JP188  FIDUCIAL0.2MM  [FIDUCIAL-0.2MM]  137.16,109.22 0 top
JP189  FIDUCIAL0.2MM  [FIDUCIAL-0.2MM]  137.16,109.22 0 bottom
JP190  FIDUCIAL0.2MM  [FIDUCIAL-0.2MM]  160.91,85.47 0 bottom
JP191  STAND-OFF  [STAND-OFF]  159.26,87.12 0 top
JP192  STAND-OFF  [STAND-OFF]  138.94,87.12 0 top
LOGO1  OSHW-LOGOS  [OSHW-LOGO-S]  55.63,19.56 0 bottom
LOGO2  QWIIC_LOGO_5MM  [QWIIC_5MM]  29.34,24.64 0 top
LOGO3  SFE_LOGO_NAME.1_INCH  [SFE_LOGO_NAME_.1]  19.56,27.18 0 bottom
LOGO4  SFE_LOGO_FLAME.1_INCH  [SFE_LOGO_FLAME_.1]  17.78,29.72 0 bottom
LOGO5  OSHW-LOGOS  [OSHW-LOGO-S]  29.72,19.56 0 bottom
LOGO6  SFE_LOGO_NAME.1_INCH  [SFE_LOGO_NAME_.1]  19.56,30.23 0 top
LOGO7  QWIIC_LOGO_5MM  [QWIIC_5MM]  55.24,24.64 0 top
LOGO8  SFE_LOGO_NAME.1_INCH  [SFE_LOGO_NAME_.1]  45.47,27.18 0 bottom
LOGO9  SFE_LOGO_FLAME.1_INCH  [SFE_LOGO_FLAME_.1]  43.69,29.72 0 bottom
LOGO10  SFE_LOGO_NAME.1_INCH  [SFE_LOGO_NAME_.1]  45.47,30.23 0 top
LOGO11  OSHW-LOGOS  [OSHW-LOGO-S]  81.53,19.56 0 bottom
LOGO12  QWIIC_LOGO_5MM  [QWIIC_5MM]  81.15,24.64 0 top
LOGO13  SFE_LOGO_NAME.1_INCH  [SFE_LOGO_NAME_.1]  71.37,27.18 0 bottom
LOGO14  SFE_LOGO_FLAME.1_INCH  [SFE_LOGO_FLAME_.1]  69.6,29.72 0 bottom
LOGO15  SFE_LOGO_NAME.1_INCH  [SFE_LOGO_NAME_.1]  71.37,30.23 0 top
LOGO16  OSHW-LOGOS  [OSHW-LOGO-S]  107.44,19.56 0 bottom
LOGO17  QWIIC_LOGO_5MM  [QWIIC_5MM]  107.06,24.64 0 top
LOGO18  SFE_LOGO_NAME.1_INCH  [SFE_LOGO_NAME_.1]  97.28,27.18 0 bottom
LOGO19  SFE_LOGO_FLAME.1_INCH  [SFE_LOGO_FLAME_.1]  95.5,29.72 0 bottom
LOGO20  SFE_LOGO_NAME.1_INCH  [SFE_LOGO_NAME_.1]  97.28,30.23 0 top
LOGO21  OSHW-LOGOS  [OSHW-LOGO-S]  133.35,19.56 0 bottom
LOGO22  QWIIC_LOGO_5MM  [QWIIC_5MM]  132.97,24.64 0 top
LOGO23  SFE_LOGO_NAME.1_INCH  [SFE_LOGO_NAME_.1]  123.19,27.18 0 bottom
LOGO24  SFE_LOGO_FLAME.1_INCH  [SFE_LOGO_FLAME_.1]  121.41,29.72 0 bottom
LOGO25  SFE_LOGO_NAME.1_INCH  [SFE_LOGO_NAME_.1]  123.19,30.23 0 top
LOGO26  OSHW-LOGOS  [OSHW-LOGO-S]  159.26,19.56 0 bottom
LOGO27  QWIIC_LOGO_5MM  [QWIIC_5MM]  158.88,24.64 0 top
LOGO28  SFE_LOGO_NAME.1_INCH  [SFE_LOGO_NAME_.1]  149.1,27.18 0 bottom
LOGO29  SFE_LOGO_FLAME.1_INCH  [SFE_LOGO_FLAME_.1]  147.32,29.72 0 bottom
LOGO30  SFE_LOGO_NAME.1_INCH  [SFE_LOGO_NAME_.1]  149.1,30.23 0 top
LOGO31  OSHW-LOGOS  [OSHW-LOGO-S]  29.72,45.47 0 bottom
LOGO32  QWIIC_LOGO_5MM  [QWIIC_5MM]  29.34,50.55 0 top
LOGO33  SFE_LOGO_NAME.1_INCH  [SFE_LOGO_NAME_.1]  19.56,53.09 0 bottom
LOGO34  SFE_LOGO_FLAME.1_INCH  [SFE_LOGO_FLAME_.1]  17.78,55.63 0 bottom
LOGO35  SFE_LOGO_NAME.1_INCH  [SFE_LOGO_NAME_.1]  19.56,56.13 0 top
LOGO36  OSHW-LOGOS  [OSHW-LOGO-S]  55.63,45.47 0 bottom
LOGO37  QWIIC_LOGO_5MM  [QWIIC_5MM]  55.24,50.55 0 top
LOGO38  SFE_LOGO_NAME.1_INCH  [SFE_LOGO_NAME_.1]  45.47,53.09 0 bottom
LOGO39  SFE_LOGO_FLAME.1_INCH  [SFE_LOGO_FLAME_.1]  43.69,55.63 0 bottom
LOGO40  SFE_LOGO_NAME.1_INCH  [SFE_LOGO_NAME_.1]  45.47,56.13 0 top
LOGO41  OSHW-LOGOS  [OSHW-LOGO-S]  81.53,45.47 0 bottom
LOGO42  QWIIC_LOGO_5MM  [QWIIC_5MM]  81.15,50.55 0 top
LOGO43  SFE_LOGO_NAME.1_INCH  [SFE_LOGO_NAME_.1]  71.37,53.09 0 bottom
LOGO44  SFE_LOGO_FLAME.1_INCH  [SFE_LOGO_FLAME_.1]  69.6,55.63 0 bottom
LOGO45  SFE_LOGO_NAME.1_INCH  [SFE_LOGO_NAME_.1]  71.37,56.13 0 top
LOGO46  OSHW-LOGOS  [OSHW-LOGO-S]  107.44,45.47 0 bottom
LOGO47  QWIIC_LOGO_5MM  [QWIIC_5MM]  107.06,50.55 0 top
LOGO48  SFE_LOGO_NAME.1_INCH  [SFE_LOGO_NAME_.1]  97.28,53.09 0 bottom
LOGO49  SFE_LOGO_FLAME.1_INCH  [SFE_LOGO_FLAME_.1]  95.5,55.63 0 bottom
LOGO50  SFE_LOGO_NAME.1_INCH  [SFE_LOGO_NAME_.1]  97.28,56.13 0 top
LOGO51  OSHW-LOGOS  [OSHW-LOGO-S]  133.35,45.47 0 bottom
LOGO52  QWIIC_LOGO_5MM  [QWIIC_5MM]  132.97,50.55 0 top
LOGO53  SFE_LOGO_NAME.1_INCH  [SFE_LOGO_NAME_.1]  123.19,53.09 0 bottom
LOGO54  SFE_LOGO_FLAME.1_INCH  [SFE_LOGO_FLAME_.1]  121.41,55.63 0 bottom
LOGO55  SFE_LOGO_NAME.1_INCH  [SFE_LOGO_NAME_.1]  123.19,56.13 0 top
LOGO56  OSHW-LOGOS  [OSHW-LOGO-S]  159.26,45.47 0 bottom
LOGO57  QWIIC_LOGO_5MM  [QWIIC_5MM]  158.88,50.55 0 top
LOGO58  SFE_LOGO_NAME.1_INCH  [SFE_LOGO_NAME_.1]  149.1,53.09 0 bottom
LOGO59  SFE_LOGO_FLAME.1_INCH  [SFE_LOGO_FLAME_.1]  147.32,55.63 0 bottom
LOGO60  SFE_LOGO_NAME.1_INCH  [SFE_LOGO_NAME_.1]  149.1,56.13 0 top
LOGO61  OSHW-LOGOS  [OSHW-LOGO-S]  29.72,71.37 0 bottom
LOGO62  QWIIC_LOGO_5MM  [QWIIC_5MM]  29.34,76.45 0 top
LOGO63  SFE_LOGO_NAME.1_INCH  [SFE_LOGO_NAME_.1]  19.56,78.99 0 bottom
LOGO64  SFE_LOGO_FLAME.1_INCH  [SFE_LOGO_FLAME_.1]  17.78,81.53 0 bottom
LOGO65  SFE_LOGO_NAME.1_INCH  [SFE_LOGO_NAME_.1]  19.56,82.04 0 top
LOGO66  OSHW-LOGOS  [OSHW-LOGO-S]  55.63,71.37 0 bottom
LOGO67  QWIIC_LOGO_5MM  [QWIIC_5MM]  55.24,76.45 0 top
LOGO68  SFE_LOGO_NAME.1_INCH  [SFE_LOGO_NAME_.1]  45.47,78.99 0 bottom
LOGO69  SFE_LOGO_FLAME.1_INCH  [SFE_LOGO_FLAME_.1]  43.69,81.53 0 bottom
LOGO70  SFE_LOGO_NAME.1_INCH  [SFE_LOGO_NAME_.1]  45.47,82.04 0 top
LOGO71  OSHW-LOGOS  [OSHW-LOGO-S]  81.53,71.37 0 bottom
LOGO72  QWIIC_LOGO_5MM  [QWIIC_5MM]  81.15,76.45 0 top
LOGO73  SFE_LOGO_NAME.1_INCH  [SFE_LOGO_NAME_.1]  71.37,78.99 0 bottom
LOGO74  SFE_LOGO_FLAME.1_INCH  [SFE_LOGO_FLAME_.1]  69.6,81.53 0 bottom
LOGO75  SFE_LOGO_NAME.1_INCH  [SFE_LOGO_NAME_.1]  71.37,82.04 0 top
LOGO76  OSHW-LOGOS  [OSHW-LOGO-S]  107.44,71.37 0 bottom
LOGO77  QWIIC_LOGO_5MM  [QWIIC_5MM]  107.06,76.45 0 top
LOGO78  SFE_LOGO_NAME.1_INCH  [SFE_LOGO_NAME_.1]  97.28,78.99 0 bottom
LOGO79  SFE_LOGO_FLAME.1_INCH  [SFE_LOGO_FLAME_.1]  95.5,81.53 0 bottom
LOGO80  SFE_LOGO_NAME.1_INCH  [SFE_LOGO_NAME_.1]  97.28,82.04 0 top
LOGO81  OSHW-LOGOS  [OSHW-LOGO-S]  133.35,71.37 0 bottom
LOGO82  QWIIC_LOGO_5MM  [QWIIC_5MM]  132.97,76.45 0 top
LOGO83  SFE_LOGO_NAME.1_INCH  [SFE_LOGO_NAME_.1]  123.19,78.99 0 bottom
LOGO84  SFE_LOGO_FLAME.1_INCH  [SFE_LOGO_FLAME_.1]  121.41,81.53 0 bottom
LOGO85  SFE_LOGO_NAME.1_INCH  [SFE_LOGO_NAME_.1]  123.19,82.04 0 top
LOGO86  OSHW-LOGOS  [OSHW-LOGO-S]  159.26,71.37 0 bottom
LOGO87  QWIIC_LOGO_5MM  [QWIIC_5MM]  158.88,76.45 0 top
LOGO88  SFE_LOGO_NAME.1_INCH  [SFE_LOGO_NAME_.1]  149.1,78.99 0 bottom
LOGO89  SFE_LOGO_FLAME.1_INCH  [SFE_LOGO_FLAME_.1]  147.32,81.53 0 bottom
LOGO90  SFE_LOGO_NAME.1_INCH  [SFE_LOGO_NAME_.1]  149.1,82.04 0 top
LOGO91  OSHW-LOGOS  [OSHW-LOGO-S]  29.72,97.28 0 bottom
LOGO92  QWIIC_LOGO_5MM  [QWIIC_5MM]  29.34,102.36 0 top
LOGO93  SFE_LOGO_NAME.1_INCH  [SFE_LOGO_NAME_.1]  19.56,104.9 0 bottom
LOGO94  SFE_LOGO_FLAME.1_INCH  [SFE_LOGO_FLAME_.1]  17.78,107.44 0 bottom
LOGO95  SFE_LOGO_NAME.1_INCH  [SFE_LOGO_NAME_.1]  19.56,107.95 0 top
LOGO96  OSHW-LOGOS  [OSHW-LOGO-S]  55.63,97.28 0 bottom
LOGO97  QWIIC_LOGO_5MM  [QWIIC_5MM]  55.24,102.36 0 top
LOGO98  SFE_LOGO_NAME.1_INCH  [SFE_LOGO_NAME_.1]  45.47,104.9 0 bottom
LOGO99  SFE_LOGO_FLAME.1_INCH  [SFE_LOGO_FLAME_.1]  43.69,107.44 0 bottom
LOGO100  SFE_LOGO_NAME.1_INCH  [SFE_LOGO_NAME_.1]  45.47,107.95 0 top
LOGO101  OSHW-LOGOS  [OSHW-LOGO-S]  81.53,97.28 0 bottom
LOGO102  QWIIC_LOGO_5MM  [QWIIC_5MM]  81.15,102.36 0 top
LOGO103  SFE_LOGO_NAME.1_INCH  [SFE_LOGO_NAME_.1]  71.37,104.9 0 bottom
LOGO104  SFE_LOGO_FLAME.1_INCH  [SFE_LOGO_FLAME_.1]  69.6,107.44 0 bottom
LOGO105  SFE_LOGO_NAME.1_INCH  [SFE_LOGO_NAME_.1]  71.37,107.95 0 top
LOGO106  OSHW-LOGOS  [OSHW-LOGO-S]  107.44,97.28 0 bottom
LOGO107  QWIIC_LOGO_5MM  [QWIIC_5MM]  107.06,102.36 0 top
LOGO108  SFE_LOGO_NAME.1_INCH  [SFE_LOGO_NAME_.1]  97.28,104.9 0 bottom
LOGO109  SFE_LOGO_FLAME.1_INCH  [SFE_LOGO_FLAME_.1]  95.5,107.44 0 bottom
LOGO110  SFE_LOGO_NAME.1_INCH  [SFE_LOGO_NAME_.1]  97.28,107.95 0 top
LOGO111  OSHW-LOGOS  [OSHW-LOGO-S]  133.35,97.28 0 bottom
LOGO112  QWIIC_LOGO_5MM  [QWIIC_5MM]  132.97,102.36 0 top
LOGO113  SFE_LOGO_NAME.1_INCH  [SFE_LOGO_NAME_.1]  123.19,104.9 0 bottom
LOGO114  SFE_LOGO_FLAME.1_INCH  [SFE_LOGO_FLAME_.1]  121.41,107.44 0 bottom
LOGO115  SFE_LOGO_NAME.1_INCH  [SFE_LOGO_NAME_.1]  123.19,107.95 0 top
LOGO116  OSHW-LOGOS  [OSHW-LOGO-S]  159.26,97.28 0 bottom
LOGO117  QWIIC_LOGO_5MM  [QWIIC_5MM]  158.88,102.36 0 top
LOGO118  SFE_LOGO_NAME.1_INCH  [SFE_LOGO_NAME_.1]  149.1,104.9 0 bottom
LOGO119  SFE_LOGO_FLAME.1_INCH  [SFE_LOGO_FLAME_.1]  147.32,107.44 0 bottom
LOGO120  SFE_LOGO_NAME.1_INCH  [SFE_LOGO_NAME_.1]  149.1,107.95 0 top
PWR  JUMPER-SMT_2_NC_TRACE_SILK  [SMT-JUMPER_2_NC_TRACE_SILK]  13.46,13.21 0 bottom
PWR1  JUMPER-SMT_2_NC_TRACE_SILK  [SMT-JUMPER_2_NC_TRACE_SILK]  39.37,13.21 0 bottom
PWR2  JUMPER-SMT_2_NC_TRACE_SILK  [SMT-JUMPER_2_NC_TRACE_SILK]  65.28,13.21 0 bottom
PWR3  JUMPER-SMT_2_NC_TRACE_SILK  [SMT-JUMPER_2_NC_TRACE_SILK]  91.19,13.21 0 bottom
PWR4  JUMPER-SMT_2_NC_TRACE_SILK  [SMT-JUMPER_2_NC_TRACE_SILK]  117.09,13.21 0 bottom
PWR5  JUMPER-SMT_2_NC_TRACE_SILK  [SMT-JUMPER_2_NC_TRACE_SILK]  143,13.21 0 bottom
PWR6  JUMPER-SMT_2_NC_TRACE_SILK  [SMT-JUMPER_2_NC_TRACE_SILK]  13.46,39.12 0 bottom
PWR7  JUMPER-SMT_2_NC_TRACE_SILK  [SMT-JUMPER_2_NC_TRACE_SILK]  39.37,39.12 0 bottom
PWR8  JUMPER-SMT_2_NC_TRACE_SILK  [SMT-JUMPER_2_NC_TRACE_SILK]  65.28,39.12 0 bottom
PWR9  JUMPER-SMT_2_NC_TRACE_SILK  [SMT-JUMPER_2_NC_TRACE_SILK]  91.19,39.12 0 bottom
PWR10  JUMPER-SMT_2_NC_TRACE_SILK  [SMT-JUMPER_2_NC_TRACE_SILK]  117.09,39.12 0 bottom
PWR11  JUMPER-SMT_2_NC_TRACE_SILK  [SMT-JUMPER_2_NC_TRACE_SILK]  143,39.12 0 bottom
PWR12  JUMPER-SMT_2_NC_TRACE_SILK  [SMT-JUMPER_2_NC_TRACE_SILK]  13.46,65.02 0 bottom
PWR13  JUMPER-SMT_2_NC_TRACE_SILK  [SMT-JUMPER_2_NC_TRACE_SILK]  39.37,65.02 0 bottom
PWR14  JUMPER-SMT_2_NC_TRACE_SILK  [SMT-JUMPER_2_NC_TRACE_SILK]  65.28,65.02 0 bottom
PWR15  JUMPER-SMT_2_NC_TRACE_SILK  [SMT-JUMPER_2_NC_TRACE_SILK]  91.19,65.02 0 bottom
PWR16  JUMPER-SMT_2_NC_TRACE_SILK  [SMT-JUMPER_2_NC_TRACE_SILK]  117.09,65.02 0 bottom
PWR17  JUMPER-SMT_2_NC_TRACE_SILK  [SMT-JUMPER_2_NC_TRACE_SILK]  143,65.02 0 bottom
PWR18  JUMPER-SMT_2_NC_TRACE_SILK  [SMT-JUMPER_2_NC_TRACE_SILK]  13.46,90.93 0 bottom
PWR19  JUMPER-SMT_2_NC_TRACE_SILK  [SMT-JUMPER_2_NC_TRACE_SILK]  39.37,90.93 0 bottom
PWR20  JUMPER-SMT_2_NC_TRACE_SILK  [SMT-JUMPER_2_NC_TRACE_SILK]  65.28,90.93 0 bottom
PWR21  JUMPER-SMT_2_NC_TRACE_SILK  [SMT-JUMPER_2_NC_TRACE_SILK]  91.19,90.93 0 bottom
PWR22  JUMPER-SMT_2_NC_TRACE_SILK  [SMT-JUMPER_2_NC_TRACE_SILK]  117.09,90.93 0 bottom
PWR23  JUMPER-SMT_2_NC_TRACE_SILK  [SMT-JUMPER_2_NC_TRACE_SILK]  143,90.93 0 bottom
R1  4.7k  [0603]  16,22.61 90 top
R2  4.7k  [0603]  23.11,22.61 90 top
R3  1k  [0603]  13.46,13.21 0 top
R4  4.7  [0603]  15.11,20.07 0 top
R5  1k  [0603]  39.37,13.21 0 top
R6  4.7k  [0603]  41.91,22.61 90 top
R7  4.7k  [0603]  49.02,22.61 90 top
R8  4.7  [0603]  41.02,20.07 0 top
R9  1k  [0603]  65.28,13.21 0 top
R10  4.7k  [0603]  67.82,22.61 90 top
R11  4.7k  [0603]  74.93,22.61 90 top
R12  4.7  [0603]  66.93,20.07 0 top
R13  1k  [0603]  91.19,13.21 0 top
R14  4.7k  [0603]  93.73,22.61 90 top
R15  4.7k  [0603]  100.84,22.61 90 top
R16  4.7  [0603]  92.84,20.07 0 top
R17  1k  [0603]  117.09,13.21 0 top
R18  4.7k  [0603]  119.63,22.61 90 top
R19  4.7k  [0603]  126.75,22.61 90 top
R20  4.7  [0603]  118.75,20.07 0 top
R21  1k  [0603]  143,13.21 0 top
R22  4.7k  [0603]  145.54,22.61 90 top
R23  4.7k  [0603]  152.65,22.61 90 top
R24  4.7  [0603]  144.65,20.07 0 top
R25  1k  [0603]  13.46,39.12 0 top
R26  4.7k  [0603]  16,48.51 90 top
R27  4.7k  [0603]  23.11,48.51 90 top
R28  4.7  [0603]  15.11,45.97 0 top
R29  1k  [0603]  39.37,39.12 0 top
R30  4.7k  [0603]  41.91,48.51 90 top
R31  4.7k  [0603]  49.02,48.51 90 top
R32  4.7  [0603]  41.02,45.97 0 top
R33  1k  [0603]  65.28,39.12 0 top
R34  4.7k  [0603]  67.82,48.51 90 top
R35  4.7k  [0603]  74.93,48.51 90 top
R36  4.7  [0603]  66.93,45.97 0 top
R37  1k  [0603]  91.19,39.12 0 top
R38  4.7k  [0603]  93.73,48.51 90 top
R39  4.7k  [0603]  100.84,48.51 90 top
R40  4.7  [0603]  92.84,45.97 0 top
R41  1k  [0603]  117.09,39.12 0 top
R42  4.7k  [0603]  119.63,48.51 90 top
R43  4.7k  [0603]  126.75,48.51 90 top
R44  4.7  [0603]  118.75,45.97 0 top
R45  1k  [0603]  143,39.12 0 top
R46  4.7k  [0603]  145.54,48.51 90 top
R47  4.7k  [0603]  152.65,48.51 90 top
R48  4.7  [0603]  144.65,45.97 0 top
R49  1k  [0603]  13.46,65.02 0 top
R50  4.7k  [0603]  16,74.42 90 top
R51  4.7k  [0603]  23.11,74.42 90 top
R52  4.7  [0603]  15.11,71.88 0 top
R53  1k  [0603]  39.37,65.02 0 top
R54  4.7k  [0603]  41.91,74.42 90 top
R55  4.7k  [0603]  49.02,74.42 90 top
R56  4.7  [0603]  41.02,71.88 0 top
R57  1k  [0603]  65.28,65.02 0 top
R58  4.7k  [0603]  67.82,74.42 90 top
R59  4.7k  [0603]  74.93,74.42 90 top
R60  4.7  [0603]  66.93,71.88 0 top
R61  1k  [0603]  91.19,65.02 0 top
R62  4.7k  [0603]  93.73,74.42 90 top
R63  4.7k  [0603]  100.84,74.42 90 top
R64  4.7  [0603]  92.84,71.88 0 top
R65  1k  [0603]  117.09,65.02 0 top
R66  4.7k  [0603]  119.63,74.42 90 top
R67  4.7k  [0603]  126.75,74.42 90 top
R68  4.7  [0603]  118.75,71.88 0 top
R69  1k  [0603]  143,65.02 0 top
R70  4.7k  [0603]  145.54,74.42 90 top
R71  4.7k  [0603]  152.65,74.42 90 top
R72  4.7  [0603]  144.65,71.88 0 top
R73  1k  [0603]  13.46,90.93 0 top
R74  4.7k  [0603]  16,100.33 90 top
R75  4.7k  [0603]  23.11,100.33 90 top
R76  4.7  [0603]  15.11,97.79 0 top
R77  1k  [0603]  39.37,90.93 0 top
R78  4.7k  [0603]  41.91,100.33 90 top
R79  4.7k  [0603]  49.02,100.33 90 top
R80  4.7  [0603]  41.02,97.79 0 top
R81  1k  [0603]  65.28,90.93 0 top
R82  4.7k  [0603]  67.82,100.33 90 top
R83  4.7k  [0603]  74.93,100.33 90 top
R84  4.7  [0603]  66.93,97.79 0 top
R85  1k  [0603]  91.19,90.93 0 top
R86  4.7k  [0603]  93.73,100.33 90 top
R87  4.7k  [0603]  100.84,100.33 90 top
R88  4.7  [0603]  92.84,97.79 0 top
R89  1k  [0603]  117.09,90.93 0 top
R90  4.7k  [0603]  119.63,100.33 90 top
R91  4.7k  [0603]  126.75,100.33 90 top
R92  4.7  [0603]  118.75,97.79 0 top
R93  1k  [0603]  143,90.93 0 top
R94  4.7k  [0603]  145.54,100.33 90 top
R95  4.7k  [0603]  152.65,100.33 90 top
R96  4.7  [0603]  144.65,97.79 0 top
U1  SGP40  [SGP40]  19.56,19.56 0 top
U2  SGP40  [SGP40]  45.47,19.56 0 top
U3  SGP40  [SGP40]  71.37,19.56 0 top
U4  SGP40  [SGP40]  97.28,19.56 0 top
U5  SGP40  [SGP40]  123.19,19.56 0 top
U6  SGP40  [SGP40]  149.1,19.56 0 top
U7  SGP40  [SGP40]  19.56,45.47 0 top
U8  SGP40  [SGP40]  45.47,45.47 0 top
U9  SGP40  [SGP40]  71.37,45.47 0 top
U10  SGP40  [SGP40]  97.28,45.47 0 top
U11  SGP40  [SGP40]  123.19,45.47 0 top
U12  SGP40  [SGP40]  149.1,45.47 0 top
U13  SGP40  [SGP40]  19.56,71.37 0 top
U14  SGP40  [SGP40]  45.47,71.37 0 top
U15  SGP40  [SGP40]  71.37,71.37 0 top
U16  SGP40  [SGP40]  97.28,71.37 0 top
U17  SGP40  [SGP40]  123.19,71.37 0 top
U18  SGP40  [SGP40]  149.1,71.37 0 top
U19  SGP40  [SGP40]  19.56,97.28 0 top
U20  SGP40  [SGP40]  45.47,97.28 0 top
U21  SGP40  [SGP40]  71.37,97.28 0 top
U22  SGP40  [SGP40]  97.28,97.28 0 top
U23  SGP40  [SGP40]  123.19,97.28 0 top
U24  SGP40  [SGP40]  149.1,97.28 0 top
U$1  [#GND#0]  15.75,10.79 90 bottom
U$2  [#3#3V#0]  18.29,11.05 90 bottom
U$3  [#SDA#0]  20.83,8.64 90 bottom
U$4  [#SCL#0]  23.37,8.64 90 bottom
U$5  [PWR0]  7.62,14.61 0 top
U$6  [#PWR#0]  12.57,13.21 0 bottom
U$7  [I2C]  47.37,22.73 0 bottom
U$8  [SGP400]  45.47,26.42 0 top
U$9  [SGP400]  54.61,25.91 0 bottom
U$10  [AIR0]  39.75,27.94 0 top
U$11  [AIR0]  55.88,24.64 0 bottom
U$12  [QUALITY0]  44.2,27.94 0 top
U$13  [QUALITY0]  54.23,23.37 0 bottom
U$14  [SENSOR0]  49.91,27.94 0 top
U$15  [I2C]  21.46,22.73 0 bottom
U$16  [SENSOR0]  54.48,22.1 0 bottom
U$17  [ADR#_0X590]  45.47,17.02 0 bottom
U$18  [#GND#0]  41.66,10.79 90 top
U$19  [SGP400]  19.56,26.42 0 top
U$20  [SGP400]  28.7,25.91 0 bottom
U$21  [#3#3V#0]  44.2,11.05 90 top
U$22  [#SDA#0]  46.74,8.64 90 top
U$23  [AIR0]  13.84,27.94 0 top
U$24  [AIR0]  29.97,24.64 0 bottom
U$25  [QUALITY0]  18.29,27.94 0 top
U$26  [#SCL#0]  49.28,8.64 90 top
U$27  [#GND#0]  41.66,10.79 90 bottom
U$28  [QUALITY0]  28.32,23.37 0 bottom
U$29  [SENSOR0]  24,27.94 0 top
U$30  [SENSOR0]  28.57,22.1 0 bottom
U$31  [ADR#_0X590]  19.56,17.02 0 bottom
U$32  [#3#3V#0]  44.2,11.05 90 bottom
U$33  [#GND#0]  15.75,10.79 90 top
U$34  [#3#3V#0]  18.29,11.05 90 top
U$35  [#SDA#0]  20.83,8.64 90 top
U$36  [#SCL#0]  23.37,8.64 90 top
U$37  [#SDA#0]  46.74,8.64 90 bottom
U$38  [#SCL#0]  49.28,8.64 90 bottom
U$39  [PWR0]  33.53,14.61 0 top
U$40  [#PWR#0]  38.48,13.21 0 bottom
U$41  [I2C]  73.28,22.73 0 bottom
U$42  [SGP400]  71.37,26.42 0 top
U$43  [SGP400]  80.52,25.91 0 bottom
U$44  [AIR0]  65.66,27.94 0 top
U$45  [AIR0]  81.79,24.64 0 bottom
U$46  [QUALITY0]  70.1,27.94 0 top
U$47  [QUALITY0]  80.14,23.37 0 bottom
U$48  [SENSOR0]  75.82,27.94 0 top
U$49  [SENSOR0]  80.39,22.1 0 bottom
U$50  [ADR#_0X590]  71.37,17.02 0 bottom
U$51  [#GND#0]  67.56,10.79 90 top
U$52  [#3#3V#0]  70.1,11.05 90 top
U$53  [#SDA#0]  72.64,8.64 90 top
U$54  [#SCL#0]  75.18,8.64 90 top
U$55  [#GND#0]  67.56,10.79 90 bottom
U$56  [#3#3V#0]  70.1,11.05 90 bottom
U$57  [#SDA#0]  72.64,8.64 90 bottom
U$58  [#SCL#0]  75.18,8.64 90 bottom
U$59  [PWR0]  59.44,14.61 0 top
U$60  [#PWR#0]  64.39,13.21 0 bottom
U$61  [I2C]  99.19,22.73 0 bottom
U$62  [SGP400]  97.28,26.42 0 top
U$63  [SGP400]  106.43,25.91 0 bottom
U$64  [AIR0]  91.57,27.94 0 top
U$65  [AIR0]  107.7,24.64 0 bottom
U$66  [QUALITY0]  96.01,27.94 0 top
U$67  [QUALITY0]  106.05,23.37 0 bottom
U$68  [SENSOR0]  101.73,27.94 0 top
U$69  [SENSOR0]  106.3,22.1 0 bottom
U$70  [ADR#_0X590]  97.28,17.02 0 bottom
U$71  [#GND#0]  93.47,10.79 90 top
U$72  [#3#3V#0]  96.01,11.05 90 top
U$73  [#SDA#0]  98.55,8.64 90 top
U$74  [#SCL#0]  101.09,8.64 90 top
U$75  [#GND#0]  93.47,10.79 90 bottom
U$76  [#3#3V#0]  96.01,11.05 90 bottom
U$77  [#SDA#0]  98.55,8.64 90 bottom
U$78  [#SCL#0]  101.09,8.64 90 bottom
U$79  [PWR0]  85.34,14.61 0 top
U$80  [#PWR#0]  90.3,13.21 0 bottom
U$81  [I2C]  125.09,22.73 0 bottom
U$82  [SGP400]  123.19,26.42 0 top
U$83  [SGP400]  132.33,25.91 0 bottom
U$84  [AIR0]  117.48,27.94 0 top
U$85  [AIR0]  133.6,24.64 0 bottom
U$86  [QUALITY0]  121.92,27.94 0 top
U$87  [QUALITY0]  131.95,23.37 0 bottom
U$88  [SENSOR0]  127.64,27.94 0 top
U$89  [SENSOR0]  132.21,22.1 0 bottom
U$90  [ADR#_0X590]  123.19,17.02 0 bottom
U$91  [#GND#0]  119.38,10.79 90 top
U$92  [#3#3V#0]  121.92,11.05 90 top
U$93  [#SDA#0]  124.46,8.64 90 top
U$94  [#SCL#0]  127,8.64 90 top
U$95  [#GND#0]  119.38,10.79 90 bottom
U$96  [#3#3V#0]  121.92,11.05 90 bottom
U$97  [#SDA#0]  124.46,8.64 90 bottom
U$98  [#SCL#0]  127,8.64 90 bottom
U$99  [PWR0]  111.25,14.61 0 top
U$100  [#PWR#0]  116.2,13.21 0 bottom
U$101  [I2C]  151,22.73 0 bottom
U$102  [SGP400]  149.1,26.42 0 top
U$103  [SGP400]  158.24,25.91 0 bottom
U$104  [AIR0]  143.38,27.94 0 top
U$105  [AIR0]  159.51,24.64 0 bottom
U$106  [QUALITY0]  147.83,27.94 0 top
U$107  [QUALITY0]  157.86,23.37 0 bottom
U$108  [SENSOR0]  153.54,27.94 0 top
U$109  [SENSOR0]  158.12,22.1 0 bottom
U$110  [ADR#_0X590]  149.1,17.02 0 bottom
U$111  [#GND#0]  145.29,10.79 90 top
U$112  [#3#3V#0]  147.83,11.05 90 top
U$113  [#SDA#0]  150.37,8.64 90 top
U$114  [#SCL#0]  152.91,8.64 90 top
U$115  [#GND#0]  145.29,10.79 90 bottom
U$116  [#3#3V#0]  147.83,11.05 90 bottom
U$117  [#SDA#0]  150.37,8.64 90 bottom
U$118  [#SCL#0]  152.91,8.64 90 bottom
U$119  [PWR0]  137.16,14.61 0 top
U$120  [#PWR#0]  142.11,13.21 0 bottom
U$121  [I2C]  21.46,48.64 0 bottom
U$122  [SGP400]  19.56,52.32 0 top
U$123  [SGP400]  28.7,51.82 0 bottom
U$124  [AIR0]  13.84,53.85 0 top
U$125  [AIR0]  29.97,50.55 0 bottom
U$126  [QUALITY0]  18.29,53.85 0 top
U$127  [QUALITY0]  28.32,49.28 0 bottom
U$128  [SENSOR0]  24,53.85 0 top
U$129  [SENSOR0]  28.57,48.01 0 bottom
U$130  [ADR#_0X590]  19.56,42.93 0 bottom
U$131  [#GND#0]  15.75,36.7 90 top
U$132  [#3#3V#0]  18.29,36.96 90 top
U$133  [#SDA#0]  20.83,34.54 90 top
U$134  [#SCL#0]  23.37,34.54 90 top
U$135  [#GND#0]  15.75,36.7 90 bottom
U$136  [#3#3V#0]  18.29,36.96 90 bottom
U$137  [#SDA#0]  20.83,34.54 90 bottom
U$138  [#SCL#0]  23.37,34.54 90 bottom
U$139  [PWR0]  7.62,40.51 0 top
U$140  [#PWR#0]  12.57,39.12 0 bottom
U$141  [I2C]  47.37,48.64 0 bottom
U$142  [SGP400]  45.47,52.32 0 top
U$143  [SGP400]  54.61,51.82 0 bottom
U$144  [AIR0]  39.75,53.85 0 top
U$145  [AIR0]  55.88,50.55 0 bottom
U$146  [QUALITY0]  44.2,53.85 0 top
U$147  [QUALITY0]  54.23,49.28 0 bottom
U$148  [SENSOR0]  49.91,53.85 0 top
U$149  [SENSOR0]  54.48,48.01 0 bottom
U$150  [ADR#_0X590]  45.47,42.93 0 bottom
U$151  [#GND#0]  41.66,36.7 90 top
U$152  [#3#3V#0]  44.2,36.96 90 top
U$153  [#SDA#0]  46.74,34.54 90 top
U$154  [#SCL#0]  49.28,34.54 90 top
U$155  [#GND#0]  41.66,36.7 90 bottom
U$156  [#3#3V#0]  44.2,36.96 90 bottom
U$157  [#SDA#0]  46.74,34.54 90 bottom
U$158  [#SCL#0]  49.28,34.54 90 bottom
U$159  [PWR0]  33.53,40.51 0 top
U$160  [#PWR#0]  38.48,39.12 0 bottom
U$161  [I2C]  73.28,48.64 0 bottom
U$162  [SGP400]  71.37,52.32 0 top
U$163  [SGP400]  80.52,51.82 0 bottom
U$164  [AIR0]  65.66,53.85 0 top
U$165  [AIR0]  81.79,50.55 0 bottom
U$166  [QUALITY0]  70.1,53.85 0 top
U$167  [QUALITY0]  80.14,49.28 0 bottom
U$168  [SENSOR0]  75.82,53.85 0 top
U$169  [SENSOR0]  80.39,48.01 0 bottom
U$170  [ADR#_0X590]  71.37,42.93 0 bottom
U$171  [#GND#0]  67.56,36.7 90 top
U$172  [#3#3V#0]  70.1,36.96 90 top
U$173  [#SDA#0]  72.64,34.54 90 top
U$174  [#SCL#0]  75.18,34.54 90 top
U$175  [#GND#0]  67.56,36.7 90 bottom
U$176  [#3#3V#0]  70.1,36.96 90 bottom
U$177  [#SDA#0]  72.64,34.54 90 bottom
U$178  [#SCL#0]  75.18,34.54 90 bottom
U$179  [PWR0]  59.44,40.51 0 top
U$180  [#PWR#0]  64.39,39.12 0 bottom
U$181  [I2C]  99.19,48.64 0 bottom
U$182  [SGP400]  97.28,52.32 0 top
U$183  [SGP400]  106.43,51.82 0 bottom
U$184  [AIR0]  91.57,53.85 0 top
U$185  [AIR0]  107.7,50.55 0 bottom
U$186  [QUALITY0]  96.01,53.85 0 top
U$187  [QUALITY0]  106.05,49.28 0 bottom
U$188  [SENSOR0]  101.73,53.85 0 top
U$189  [SENSOR0]  106.3,48.01 0 bottom
U$190  [ADR#_0X590]  97.28,42.93 0 bottom
U$191  [#GND#0]  93.47,36.7 90 top
U$192  [#3#3V#0]  96.01,36.96 90 top
U$193  [#SDA#0]  98.55,34.54 90 top
U$194  [#SCL#0]  101.09,34.54 90 top
U$195  [#GND#0]  93.47,36.7 90 bottom
U$196  [#3#3V#0]  96.01,36.96 90 bottom
U$197  [#SDA#0]  98.55,34.54 90 bottom
U$198  [#SCL#0]  101.09,34.54 90 bottom
U$199  [PWR0]  85.34,40.51 0 top
U$200  [#PWR#0]  90.3,39.12 0 bottom
U$201  [I2C]  125.09,48.64 0 bottom
U$202  [SGP400]  123.19,52.32 0 top
U$203  [SGP400]  132.33,51.82 0 bottom
U$204  [AIR0]  117.48,53.85 0 top
U$205  [AIR0]  133.6,50.55 0 bottom
U$206  [QUALITY0]  121.92,53.85 0 top
U$207  [QUALITY0]  131.95,49.28 0 bottom
U$208  [SENSOR0]  127.64,53.85 0 top
U$209  [SENSOR0]  132.21,48.01 0 bottom
U$210  [ADR#_0X590]  123.19,42.93 0 bottom
U$211  [#GND#0]  119.38,36.7 90 top
U$212  [#3#3V#0]  121.92,36.96 90 top
U$213  [#SDA#0]  124.46,34.54 90 top
U$214  [#SCL#0]  127,34.54 90 top
U$215  [#GND#0]  119.38,36.7 90 bottom
U$216  [#3#3V#0]  121.92,36.96 90 bottom
U$217  [#SDA#0]  124.46,34.54 90 bottom
U$218  [#SCL#0]  127,34.54 90 bottom
U$219  [PWR0]  111.25,40.51 0 top
U$220  [#PWR#0]  116.2,39.12 0 bottom
U$221  [I2C]  151,48.64 0 bottom
U$222  [SGP400]  149.1,52.32 0 top
U$223  [SGP400]  158.24,51.82 0 bottom
U$224  [AIR0]  143.38,53.85 0 top
U$225  [AIR0]  159.51,50.55 0 bottom
U$226  [QUALITY0]  147.83,53.85 0 top
U$227  [QUALITY0]  157.86,49.28 0 bottom
U$228  [SENSOR0]  153.54,53.85 0 top
U$229  [SENSOR0]  158.12,48.01 0 bottom
U$230  [ADR#_0X590]  149.1,42.93 0 bottom
U$231  [#GND#0]  145.29,36.7 90 top
U$232  [#3#3V#0]  147.83,36.96 90 top
U$233  [#SDA#0]  150.37,34.54 90 top
U$234  [#SCL#0]  152.91,34.54 90 top
U$235  [#GND#0]  145.29,36.7 90 bottom
U$236  [#3#3V#0]  147.83,36.96 90 bottom
U$237  [#SDA#0]  150.37,34.54 90 bottom
U$238  [#SCL#0]  152.91,34.54 90 bottom
U$239  [PWR0]  137.16,40.51 0 top
U$240  [#PWR#0]  142.11,39.12 0 bottom
U$241  [I2C]  21.46,74.55 0 bottom
U$242  [SGP400]  19.56,78.23 0 top
U$243  [SGP400]  28.7,77.72 0 bottom
U$244  [AIR0]  13.84,79.76 0 top
U$245  [AIR0]  29.97,76.45 0 bottom
U$246  [QUALITY0]  18.29,79.76 0 top
U$247  [QUALITY0]  28.32,75.18 0 bottom
U$248  [SENSOR0]  24,79.76 0 top
U$249  [SENSOR0]  28.57,73.91 0 bottom
U$250  [ADR#_0X590]  19.56,68.83 0 bottom
U$251  [#GND#0]  15.75,62.61 90 top
U$252  [#3#3V#0]  18.29,62.86 90 top
U$253  [#SDA#0]  20.83,60.45 90 top
U$254  [#SCL#0]  23.37,60.45 90 top
U$255  [#GND#0]  15.75,62.61 90 bottom
U$256  [#3#3V#0]  18.29,62.86 90 bottom
U$257  [#SDA#0]  20.83,60.45 90 bottom
U$258  [#SCL#0]  23.37,60.45 90 bottom
U$259  [PWR0]  7.62,66.42 0 top
U$260  [#PWR#0]  12.57,65.02 0 bottom
U$261  [I2C]  47.37,74.55 0 bottom
U$262  [SGP400]  45.47,78.23 0 top
U$263  [SGP400]  54.61,77.72 0 bottom
U$264  [AIR0]  39.75,79.76 0 top
U$265  [AIR0]  55.88,76.45 0 bottom
U$266  [QUALITY0]  44.2,79.76 0 top
U$267  [QUALITY0]  54.23,75.18 0 bottom
U$268  [SENSOR0]  49.91,79.76 0 top
U$269  [SENSOR0]  54.48,73.91 0 bottom
U$270  [ADR#_0X590]  45.47,68.83 0 bottom
U$271  [#GND#0]  41.66,62.61 90 top
U$272  [#3#3V#0]  44.2,62.86 90 top
U$273  [#SDA#0]  46.74,60.45 90 top
U$274  [#SCL#0]  49.28,60.45 90 top
U$275  [#GND#0]  41.66,62.61 90 bottom
U$276  [#3#3V#0]  44.2,62.86 90 bottom
U$277  [#SDA#0]  46.74,60.45 90 bottom
U$278  [#SCL#0]  49.28,60.45 90 bottom
U$279  [PWR0]  33.53,66.42 0 top
U$280  [#PWR#0]  38.48,65.02 0 bottom
U$281  [I2C]  73.28,74.55 0 bottom
U$282  [SGP400]  71.37,78.23 0 top
U$283  [SGP400]  80.52,77.72 0 bottom
U$284  [AIR0]  65.66,79.76 0 top
U$285  [AIR0]  81.79,76.45 0 bottom
U$286  [QUALITY0]  70.1,79.76 0 top
U$287  [QUALITY0]  80.14,75.18 0 bottom
U$288  [SENSOR0]  75.82,79.76 0 top
U$289  [SENSOR0]  80.39,73.91 0 bottom
U$290  [ADR#_0X590]  71.37,68.83 0 bottom
U$291  [#GND#0]  67.56,62.61 90 top
U$292  [#3#3V#0]  70.1,62.86 90 top
U$293  [#SDA#0]  72.64,60.45 90 top
U$294  [#SCL#0]  75.18,60.45 90 top
U$295  [#GND#0]  67.56,62.61 90 bottom
U$296  [#3#3V#0]  70.1,62.86 90 bottom
U$297  [#SDA#0]  72.64,60.45 90 bottom
U$298  [#SCL#0]  75.18,60.45 90 bottom
U$299  [PWR0]  59.44,66.42 0 top
U$300  [#PWR#0]  64.39,65.02 0 bottom
U$301  [I2C]  99.19,74.55 0 bottom
U$302  [SGP400]  97.28,78.23 0 top
U$303  [SGP400]  106.43,77.72 0 bottom
U$304  [AIR0]  91.57,79.76 0 top
U$305  [AIR0]  107.7,76.45 0 bottom
U$306  [QUALITY0]  96.01,79.76 0 top
U$307  [QUALITY0]  106.05,75.18 0 bottom
U$308  [SENSOR0]  101.73,79.76 0 top
U$309  [SENSOR0]  106.3,73.91 0 bottom
U$310  [ADR#_0X590]  97.28,68.83 0 bottom
U$311  [#GND#0]  93.47,62.61 90 top
U$312  [#3#3V#0]  96.01,62.86 90 top
U$313  [#SDA#0]  98.55,60.45 90 top
U$314  [#SCL#0]  101.09,60.45 90 top
U$315  [#GND#0]  93.47,62.61 90 bottom
U$316  [#3#3V#0]  96.01,62.86 90 bottom
U$317  [#SDA#0]  98.55,60.45 90 bottom
U$318  [#SCL#0]  101.09,60.45 90 bottom
U$319  [PWR0]  85.34,66.42 0 top
U$320  [#PWR#0]  90.3,65.02 0 bottom
U$321  [I2C]  125.09,74.55 0 bottom
U$322  [SGP400]  123.19,78.23 0 top
U$323  [SGP400]  132.33,77.72 0 bottom
U$324  [AIR0]  117.48,79.76 0 top
U$325  [AIR0]  133.6,76.45 0 bottom
U$326  [QUALITY0]  121.92,79.76 0 top
U$327  [QUALITY0]  131.95,75.18 0 bottom
U$328  [SENSOR0]  127.64,79.76 0 top
U$329  [SENSOR0]  132.21,73.91 0 bottom
U$330  [ADR#_0X590]  123.19,68.83 0 bottom
U$331  [#GND#0]  119.38,62.61 90 top
U$332  [#3#3V#0]  121.92,62.86 90 top
U$333  [#SDA#0]  124.46,60.45 90 top
U$334  [#SCL#0]  127,60.45 90 top
U$335  [#GND#0]  119.38,62.61 90 bottom
U$336  [#3#3V#0]  121.92,62.86 90 bottom
U$337  [#SDA#0]  124.46,60.45 90 bottom
U$338  [#SCL#0]  127,60.45 90 bottom
U$339  [PWR0]  111.25,66.42 0 top
U$340  [#PWR#0]  116.2,65.02 0 bottom
U$341  [I2C]  151,74.55 0 bottom
U$342  [SGP400]  149.1,78.23 0 top
U$343  [SGP400]  158.24,77.72 0 bottom
U$344  [AIR0]  143.38,79.76 0 top
U$345  [AIR0]  159.51,76.45 0 bottom
U$346  [QUALITY0]  147.83,79.76 0 top
U$347  [QUALITY0]  157.86,75.18 0 bottom
U$348  [SENSOR0]  153.54,79.76 0 top
U$349  [SENSOR0]  158.12,73.91 0 bottom
U$350  [ADR#_0X590]  149.1,68.83 0 bottom
U$351  [#GND#0]  145.29,62.61 90 top
U$352  [#3#3V#0]  147.83,62.86 90 top
U$353  [#SDA#0]  150.37,60.45 90 top
U$354  [#SCL#0]  152.91,60.45 90 top
U$355  [#GND#0]  145.29,62.61 90 bottom
U$356  [#3#3V#0]  147.83,62.86 90 bottom
U$357  [#SDA#0]  150.37,60.45 90 bottom
U$358  [#SCL#0]  152.91,60.45 90 bottom
U$359  [PWR0]  137.16,66.42 0 top
U$360  [#PWR#0]  142.11,65.02 0 bottom
U$361  [I2C]  21.46,100.46 0 bottom
U$362  [SGP400]  19.56,104.14 0 top
U$363  [SGP400]  28.7,103.63 0 bottom
U$364  [AIR0]  13.84,105.66 0 top
U$365  [AIR0]  29.97,102.36 0 bottom
U$366  [QUALITY0]  18.29,105.66 0 top
U$367  [QUALITY0]  28.32,101.09 0 bottom
U$368  [SENSOR0]  24,105.66 0 top
U$369  [SENSOR0]  28.57,99.82 0 bottom
U$370  [ADR#_0X590]  19.56,94.74 0 bottom
U$371  [#GND#0]  15.75,88.52 90 top
U$372  [#3#3V#0]  18.29,88.77 90 top
U$373  [#SDA#0]  20.83,86.36 90 top
U$374  [#SCL#0]  23.37,86.36 90 top
U$375  [#GND#0]  15.75,88.52 90 bottom
U$376  [#3#3V#0]  18.29,88.77 90 bottom
U$377  [#SDA#0]  20.83,86.36 90 bottom
U$378  [#SCL#0]  23.37,86.36 90 bottom
U$379  [PWR0]  7.62,92.33 0 top
U$380  [#PWR#0]  12.57,90.93 0 bottom
U$381  [I2C]  47.37,100.46 0 bottom
U$382  [SGP400]  45.47,104.14 0 top
U$383  [SGP400]  54.61,103.63 0 bottom
U$384  [AIR0]  39.75,105.66 0 top
U$385  [AIR0]  55.88,102.36 0 bottom
U$386  [QUALITY0]  44.2,105.66 0 top
U$387  [QUALITY0]  54.23,101.09 0 bottom
U$388  [SENSOR0]  49.91,105.66 0 top
U$389  [SENSOR0]  54.48,99.82 0 bottom
U$390  [ADR#_0X590]  45.47,94.74 0 bottom
U$391  [#GND#0]  41.66,88.52 90 top
U$392  [#3#3V#0]  44.2,88.77 90 top
U$393  [#SDA#0]  46.74,86.36 90 top
U$394  [#SCL#0]  49.28,86.36 90 top
U$395  [#GND#0]  41.66,88.52 90 bottom
U$396  [#3#3V#0]  44.2,88.77 90 bottom